# Allegro board TIDA01473B-Layer-Plots.brd
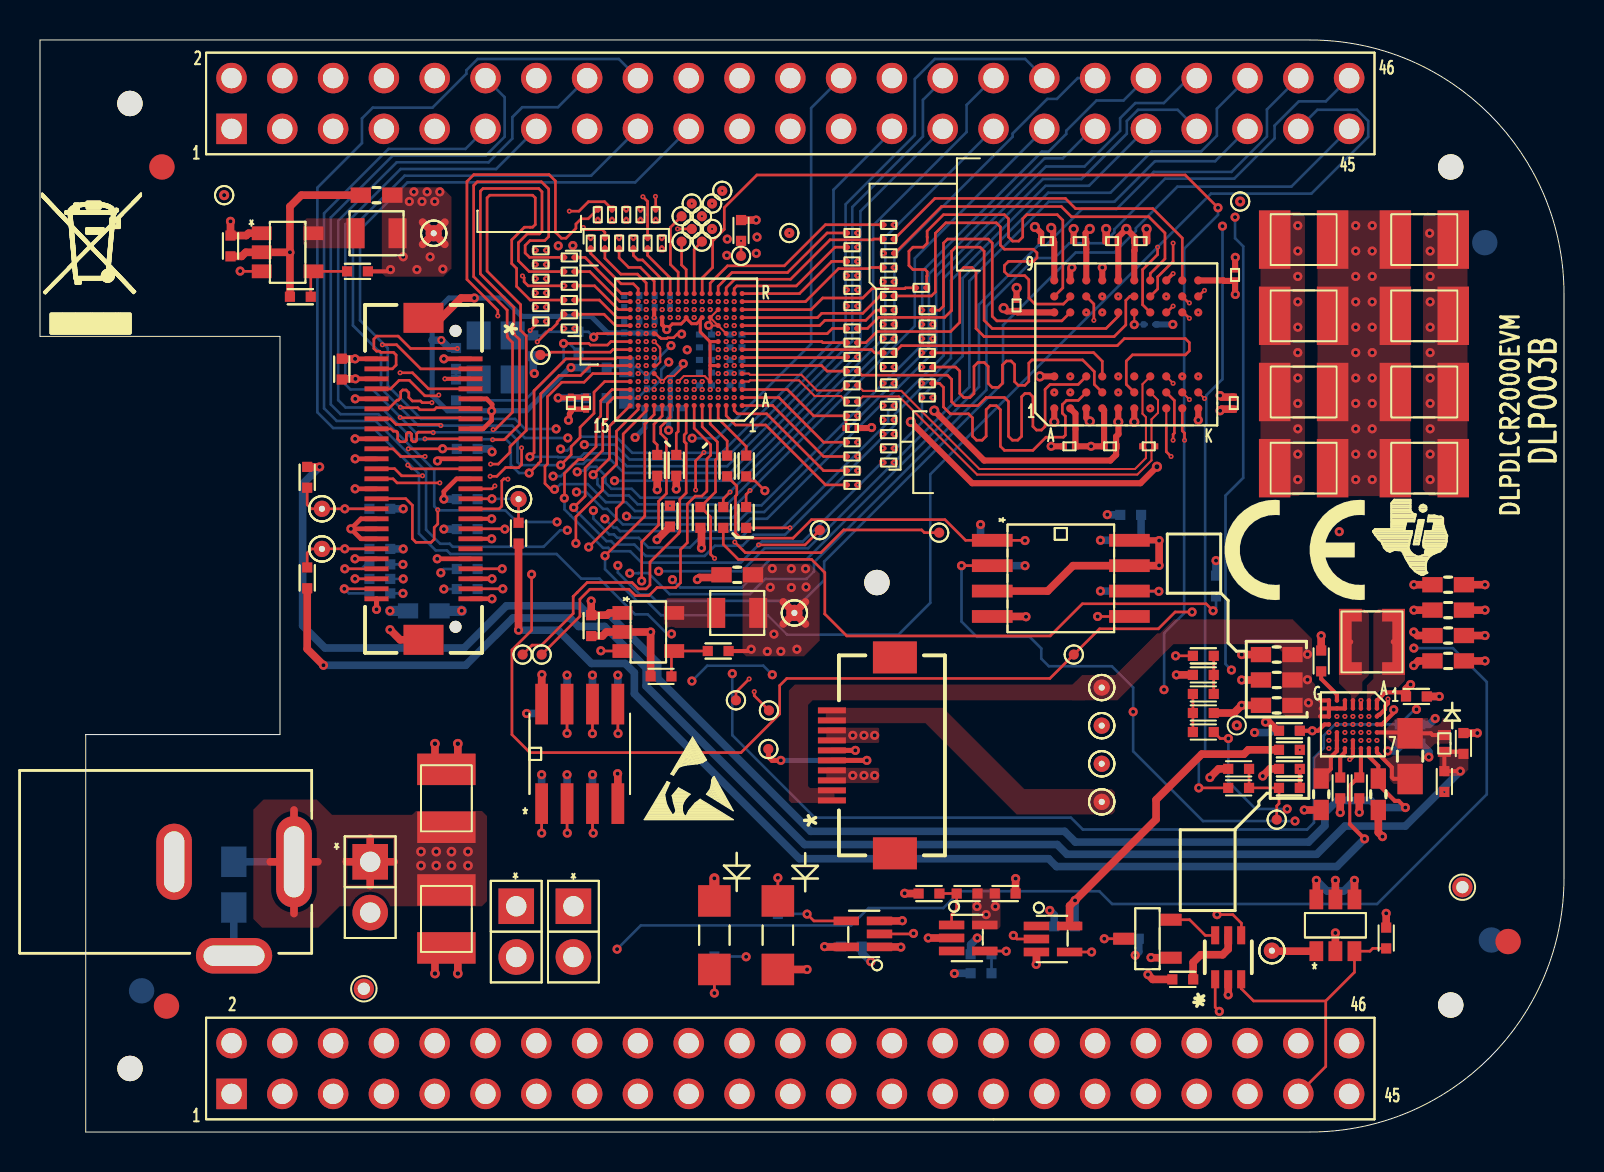
[diagram p0: board, top side]
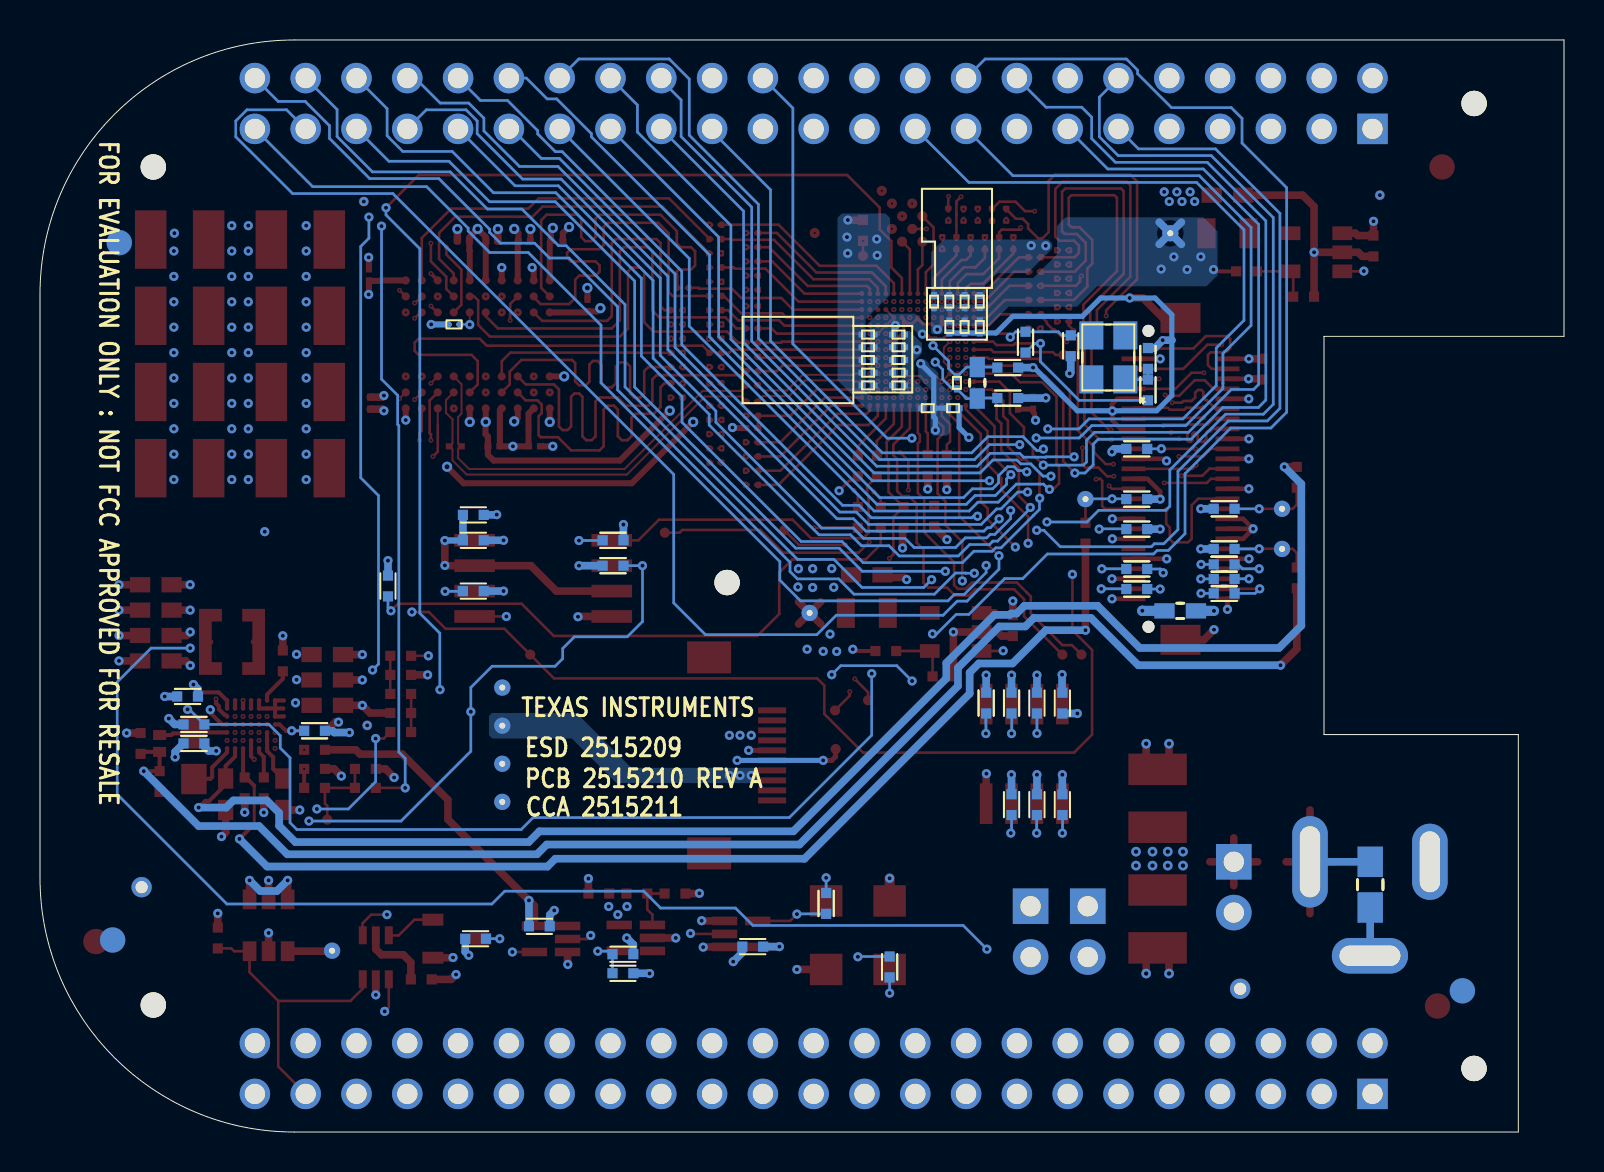
[diagram p1: board, bottom side, seen from below]

Outline 76.2 x 54.61 mm; copper layers: TOP, LY2, LY3, LY4, LY5, BOTTOM. Coordinates in mm from the lower left corner of the outline.
Outline path: 0,54.61 0,39.79 12,39.79 12,19.88 2.29,19.88 2.29,0 63.5,0 arc(72.48,3.72) 76.2,12.7 76.2,41.91 arc(72.48,50.89) 63.5,54.61 0,54.61

## Design rules (mm)
net group DMD_BUS: nets DMD_BUS DMD_BUS_T
net group DMD_D0: nets DMD_D0 DMD_D0_T
net group DMD_D1: nets DMD_D1 DMD_D1_T
net group DMD_D2: nets DMD_D2 DMD_D2_T
net group DMD_D3: nets DMD_D3 DMD_D3_T
net group DMD_D4: nets DMD_D4 DMD_D4_T
net group DMD_D5: nets DMD_D5 DMD_D5_T
net group DMD_D6: nets DMD_D6 DMD_D6_T
net group DMD_D7: nets DMD_D7 DMD_D7_T
net group DMD_D8: nets DMD_D8 DMD_D8_T
net group DMD_D9: nets DMD_D9 DMD_D9_T
net group DMD_D10: nets DMD_D10 DMD_D10_T
net group DMD_D11: nets DMD_D11 DMD_D11_T
net group DMD_D12: nets DMD_D12 DMD_D12_T
net group DMD_D13: nets DMD_D13 DMD_D13_T
net group DMD_D14: nets DMD_D14 DMD_D14_T
net group DMD_DCLK: nets DMD_DCLK DMD_DCLK_T
net group DMD_LOADB: nets DMD_LOADB DMD_LOADB_T
net group DMD_SAC_BUS: nets DMD_SAC_BUS DMD_SAC_BUS_T
net group DMD_SAC_CLK: nets DMD_SAC_CLK DMD_SAC_CLK_T
net group DMD_SCTRL: nets DMD_SCTRL DMD_SCTRL_T
net group DMD_STRB: nets DMD_STRB DMD_STRB_T
net group DMD_TRC: nets DMD_TRC DMD_TRC_T
net group MEM0_A0: nets MEM0_A0 MEM_T_A0
net group MEM0_A1: nets MEM0_A1 MEM_T_A1
net group MEM0_A2: nets MEM0_A2 MEM_T_A2
net group MEM0_A3: nets MEM0_A3 MEM_T_A3
net group MEM0_A4: nets MEM0_A4 MEM_T_A4
net group MEM0_A5: nets MEM0_A5 MEM_T_A5
net group MEM0_A6: nets MEM0_A6 MEM_T_A6
net group MEM0_A7: nets MEM0_A7 MEM_T_A7
net group MEM0_A8: nets MEM0_A8 MEM_T_A8
net group MEM0_A9: nets MEM0_A9 MEM_T_A9
net group MEM0_A10: nets MEM0_A10 MEM_T_A10
net group MEM0_A11: nets MEM0_A11 MEM_T_A11
net group MEM0_A12: nets MEM0_A12 MEM_T_A12
net group MEM0_BA0: nets MEM0_BA0 MEM_T_BA0
net group MEM0_BA1: nets MEM0_BA1 MEM_T_BA1
net group MEM0_CASZ: nets MEM0_CASZ MEM_T_CASZ
net group MEM0_CKE: nets MEM0_CKE MEM_T_CKE
net group MEM0_CLK_N: nets MEM0_CLK_N MEM_T_CLK_N
net group MEM0_CLK_P: nets MEM0_CLK_P MEM_T_CLK_P
net group MEM0_CSZ: nets MEM0_CSZ MEM_T_CSZ
net group MEM0_DQ0: nets MEM0_DQ0 MEM_T_DQ0
net group MEM0_DQ1: nets MEM0_DQ1 MEM_T_DQ1
net group MEM0_DQ2: nets MEM0_DQ2 MEM_T_DQ2
net group MEM0_DQ3: nets MEM0_DQ3 MEM_T_DQ3
net group MEM0_DQ4: nets MEM0_DQ4 MEM_T_DQ4
net group MEM0_DQ5: nets MEM0_DQ5 MEM_T_DQ5
net group MEM0_DQ6: nets MEM0_DQ6 MEM_T_DQ6
net group MEM0_DQ7: nets MEM0_DQ7 MEM_T_DQ7
net group MEM0_DQ8: nets MEM0_DQ8 MEM_T_DQ8
net group MEM0_DQ9: nets MEM0_DQ9 MEM_T_DQ9
net group MEM0_DQ10: nets MEM0_DQ10 MEM_T_DQ10
net group MEM0_DQ11: nets MEM0_DQ11 MEM_T_DQ11
net group MEM0_DQ12: nets MEM0_DQ12 MEM_T_DQ12
net group MEM0_DQ13: nets MEM0_DQ13 MEM_T_DQ13
net group MEM0_DQ14: nets MEM0_DQ14 MEM_T_DQ14
net group MEM0_DQ15: nets MEM0_DQ15 MEM_T_DQ15
net group MEM0_LDM: nets MEM0_LDM MEM_T_LDM
net group MEM0_LDQS: nets MEM0_LDQS MEM_T_LDQS
net group MEM0_RASZ: nets MEM0_RASZ MEM_T_RASZ
net group MEM0_UDM: nets MEM0_UDM MEM_T_UDM
net group MEM0_UDQS: nets MEM0_UDQS MEM_T_UDQS
net group MEM0_WEZ: nets MEM0_WEZ MEM_T_WEZ

## Placement (name value [footprint] x y rotation side)
C1  4.7uF  [0402]  9.53 44.31 90 top
C2  10uF  [0603]  16.83 46.85 180 top
C3  0.1uF  [0201]  50.36 44.55 0 top
C4  0.1uF  [0201]  51.98 44.55 0 top
C5  0.1uF  [0201]  53.61 44.55 0 top
C6  0.1uF  [0201]  55.03 44.55 180 top
C7  1uF  [0201]  59.75 42.86 270 top
C8  100uF  [1210]  63.18 44.63 180 top
C9  100uF  [1210]  69.22 44.63 0 top
C10  0.1uF  [0201]  48.83 41.34 270 top
C11  100uF  [1210]  63.18 40.82 180 top
C12  100uF  [1210]  69.22 40.82 0 top
C13  0.1uF  [0201]  26.54 36.45 90 top
C14  1uF  [0201]  27.3 36.45 90 top
C15  0.1uF  [0201]  51.47 34.29 0 top
C16  0.1uF  [0201]  53.51 34.29 180 top
C17  0.1uF  [0201]  59.69 36.45 90 top
C18  100uF  [1210]  63.18 37.01 180 top
C19  100uF  [1210]  69.22 37.01 0 top
C20  100uF  [1210]  63.18 33.2 180 top
C21  100uF  [1210]  69.22 33.2 0 top
C23  4.7uF  [0402]  27.56 25.32 90 top
C24  10uF  [0603]  34.86 27.86 180 top
C25  0.1uF  [0402_AVXA]  58.17 22.86 180 top
C26  10uF  [0603]  61.84 23.88 180 top
C27  0.1uF  [0402_AVXA]  64.06 23.56 270 top
C28  10uF  [0603]  70.41 27.37 0 top
C29  10uF  [0603]  70.41 26.1 0 top
C30  10uF  [0603]  70.41 24.83 0 top
C31  10uF  [0603]  70.41 23.56 0 top
C32  100uF  [1210]  20.32 16.69 270 top
C33  0.1uF  [0402_AVXA]  58.17 20.95 0 top
C34  10uF  [0603]  61.84 22.61 180 top
C35  10uF  [0603]  61.84 21.34 180 top
C36  1uF  [0402]  62.47 20.07 0 top
C37  0.01uF  [0402]  62.47 18.16 180 top
C38  2.2uF  [0402]  65.01 17.21 270 top
C39  1uF  [0402]  65.96 17.21 270 top
C40  1uF  [0603]  66.92 16.89 270 top
C41  0.1uF  [0402_AVXA]  68.82 21.78 0 top
C42  0.22uF  [0402]  71.17 19.43 90 top
C43  100uF  [1210]  20.32 10.66 90 top
C44  1uF  [0402]  48.26 11.93 0 top
C100  0.1uF  [0201]  34.8 39.88 180 bottom
C101  0.1uF  [0201]  34.8 39.24 180 bottom
C102  0.1uF  [0201]  33.27 39.88 0 bottom
C103  0.1uF  [0201]  33.27 39.24 0 bottom
C104  0.1uF  [0201]  31.5 41.53 270 bottom
C105  0.1uF  [0201]  30.73 41.53 270 bottom
C106  0.1uF  [0201]  30.73 40.26 90 bottom
C107  0.1uF  [0201]  29.97 41.53 270 bottom
C108  0.1uF  [0201]  29.97 40.26 90 bottom
C109  0.1uF  [0201]  29.21 41.53 270 bottom
C110  0.1uF  [0201]  29.21 40.26 90 bottom
C111  18pF  [0402]  24.66 39.32 90 bottom
C112  0.1uF  [0201]  34.8 38.61 180 bottom
C113  0.1uF  [0201]  34.8 37.97 180 bottom
C114  1uF  [0201]  34.8 37.34 180 bottom
C115  0.1uF  [0201]  33.27 38.61 0 bottom
C116  0.1uF  [0201]  33.27 37.97 0 bottom
C117  0.1uF  [0201]  33.27 37.34 0 bottom
C118  0.1uF  [0201]  31.81 36.2 180 bottom
C119  0.1uF  [0201]  30.54 36.2 0 bottom
C120  0.1uF  [0201]  30.35 37.47 270 bottom
C121  10uF  [0603]  29.34 37.47 270 bottom
C122  18pF  [0402]  20.8 38.68 90 bottom
C123  0.1uF  [0402_AVXA]  54.53 29.59 180 bottom
C124  0.1uF  [0402]  16.99 31.17 0 bottom
C125  0.1uF  [0402]  16.99 29.16 0 bottom
C126  0.1uF  [0402_AVXA]  15.09 38.15 270 top
C127  0.1uF  [0402]  21.36 31.65 180 bottom
C128  0.22uF  [0603]  19.19 26.06 180 bottom
C129  0.1uF  [0402_AVXA]  68.82 21.78 0 bottom
C130  0.1uF  [0402_AVXA]  68.5 19.43 0 bottom
C131  0.1uF  [0402_AVXA]  25.08 21.45 270 bottom
C132  0.1uF  [0402_AVXA]  51.23 10.29 180 bottom
C133  0.1uF  [0402_AVXA]  47.05 8.89 180 bottom
C134  0.1uF  [0402_AVXA]  40.56 9.27 0 bottom
D1  PMEG4002EL  [SOD882]  70.22 19.43 270 top
D2  green  [1206]  33.72 9.84 90 top
D3  green  [1206]  36.89 9.84 90 top
F100  BLM15PD800SN1D  [0402]  27.81 38.23 180 bottom
F101  BLM15PD800SN1D  [0402]  27.81 36.7 0 bottom
J1  PS-50028-05081-001  [CON_SMVT_50028-50]  19.18 32.66 270 top
J2  Pwr Jack, 2.1mm pin  [PJ-002A]  12.7 13.51 180 top
J3  HDR,2P,1R  [HDR2P_1R]  16.51 13.51 180 top
J4  HDR,2P,1R  [HDR2P_1R]  23.81 11.29 180 top
J5  HDR,2P,1R  [HDR2P_1R]  26.67 11.29 180 top
JLEDFLEX  EM,CONN,10P,ZIF  [CON_SMRT_52893-1095_NO-GND]  42.6 18.83 90 top
L1  2.2uH  [1008_2P5MMX2MM]  16.83 44.95 0 top
L2  2.2uH  [1008_2P5MMX2MM]  34.86 25.96 0 top
L3  2.2uH  [COILCRAFT_LPS3015]  66.6 24.51 180 top
L4  10uH  [0805]  68.5 18.8 90 top
NOREF  -  []  32.69 17.4 0 top
NOREF#2  -  []  96.9 37.47 0 top
NOREF#3  -  [unnamed#2]  70.54 48.26 0 top
NOREF#4  -  [unnamed#2]  4.5 51.44 0 top
NOREF#5  -  [unnamed#3]  6.32 6.3 0 top
NOREF#6  -  []  -9.45 -48.23 0 top
NOREF#7  -  []  2.29 0 90 top
NOREF#8  -  []  2.29 0 0 top
NOREF#9  -  [unnamed#2]  4.5 3.18 0 top
NOREF#10  -  []  71.96 51.38 0 top
NOREF#11  -  []  111.05 -49.99 0 top
NOREF#12  -  [unnamed#3]  73.41 9.53 0 top
NOREF#13  -  []  2.29 0 90 top
NOREF#14  -  []  -95.55 -48.74 0 top
NOREF#15  -  []  2.29 0 0 top
NOREF#16  -  [unnamed#2]  41.85 27.48 0 top
NOREF#17  -  [unnamed#2]  70.54 6.35 0 top
NOREF#18  -  []  62.74 29.11 0 top
NOREF#19  -  []  0 54.61 0 top
NOREF#20  -  []  2.29 0 90 top
NOREF#21  -  []  0 54.61 0 top
NOREF#22  -  []  68.55 30 0 top
NOREF#23  -  []  2.59 43.97 0 top
NOREF#24  -  [unnamed#3]  6.1 48.26 0 top
NOREF#25  -  []  2.29 0 90 top
NOREF#26  -  [unnamed#3]  72.57 9.6 180 bottom
NOREF#27  -  [unnamed#3]  72.24 44.48 180 bottom
NOREF#28  -  [unnamed#3]  5.08 7.06 180 bottom
P1  EM,HDR,46P,2R,2x  [PRT_12790]  9.58 50.16 90 top
P2  EM,HDR,46P,2R,2x  [PRT_12790]  9.58 1.91 90 top
R1  120k  [0402]  13.02 41.77 180 top
R2  82k  [0402]  15.88 43.04 0 top
R3  30  [0201_R]  25.04 44.09 0 top
R5  30  [0201_R]  25.04 43.38 0 top
R6  30  [0201_R]  25.04 42.67 0 top
R7  30  [0201_R]  25.04 41.96 0 top
R8  30  [0201_R]  26.47 43.74 0 top
R9  30  [0201_R]  26.47 43.03 0 top
R10  30  [0201_R]  26.47 42.32 0 top
R11  30  [0201_R]  26.47 41.61 0 top
R12  30  [0201_R]  27.53 44.45 270 top
R13  30  [0201_R]  27.89 45.87 270 top
R14  30  [0201_R]  28.24 44.45 270 top
R15  30  [0201_R]  28.6 45.87 270 top
R16  30  [0201_R]  28.96 44.45 270 top
R17  30  [0201_R]  29.31 45.87 270 top
R18  30  [0201_R]  29.67 44.45 270 top
R19  30  [0201_R]  30.02 45.87 270 top
R20  30  [0201_R]  30.38 44.45 270 top
R21  30  [0201_R]  30.78 45.87 270 top
R22  30  [0201_R]  31.09 44.45 270 top
R23  10k  [0402]  35.05 45.09 270 top
R24  30  [0201_R]  40.6 44.96 180 top
R25  30  [0201_R]  40.6 44.25 180 top
R26  30  [0201_R]  40.6 43.54 180 top
R27  30  [0201_R]  40.6 42.83 180 top
R28  30  [0201_R]  40.6 42.11 180 top
R29  30  [0201_R]  42.43 45.37 180 top
R30  30  [0201_R]  42.43 44.65 180 top
R31  30  [0201_R]  42.43 43.23 180 top
R32  30  [0201_R]  42.43 42.52 180 top
R33  30  [0201_R]  42.43 41.81 0 top
R34  30  [0201_R]  42.45 43.94 180 top
R35  30  [0201_R]  44.06 42.22 0 top
R36  30  [0201_R]  25.04 41.25 0 top
R37  30  [0201_R]  25.04 40.54 0 top
R38  30  [0201_R]  26.47 40.89 0 top
R39  30  [0201_R]  26.47 40.18 0 top
R40  30  [0201_R]  40.6 41.3 180 top
R41  30  [0201_R]  40.6 40.18 0 top
R42  30  [0201_R]  40.6 39.47 180 top
R43  30  [0201_R]  40.6 38.76 0 top
R44  30  [0201_R]  40.6 38.05 0 top
R45  30  [0201_R]  42.43 41.1 0 top
R46  30  [0201_R]  42.43 40.39 0 top
R47  30  [0201_R]  42.43 39.68 0 top
R48  30  [0201_R]  42.43 38.96 180 top
R49  30  [0201_R]  42.43 38.25 0 top
R50  30  [0201_R]  44.36 41.1 0 top
R51  30  [0201_R]  44.36 40.39 0 top
R52  30  [0201_R]  44.36 39.68 0 top
R53  30  [0201_R]  44.36 38.96 0 top
R54  30  [0201_R]  44.36 38.25 0 top
R55  30  [0201_R]  40.6 37.34 180 top
R56  30  [0201_R]  40.6 36.53 180 top
R57  30  [0201_R]  40.6 35.82 180 top
R58  10k  [0201]  40.6 35.21 0 top
R59  30  [0201_R]  40.6 34.49 180 top
R60  30  [0201_R]  42.43 37.44 0 top
R61  30  [0201_R]  42.43 36.32 0 top
R62  30  [0201_R]  42.43 35.61 180 top
R63  30  [0201_R]  42.43 34.9 180 top
R64  30  [0201_R]  42.43 34.19 180 top
R65  30  [0201_R]  44.36 37.44 0 top
R66  30  [0201_R]  44.36 36.73 0 top
R67  100  [0201]  55.44 34.29 180 top
R68  0  [0402]  13.36 32.74 270 top
R69  0  [0402]  13.36 27.71 90 top
R70  100k  [0402]  30.86 33.34 90 top
R71  10k  [0402]  31.5 30.8 270 top
R72  30.1  [0402]  31.81 33.34 270 top
R74  100k  [0402]  33.02 30.73 90 top
R75  30.1  [0402]  34.16 30.73 90 top
R76  30.1  [0402]  34.36 33.31 90 top
R77  30.1  [0402]  35.31 30.73 90 top
R78  30.1  [0402]  35.31 33.31 90 top
R79  30  [0201_R]  40.6 33.78 180 top
R80  30  [0201_R]  40.6 33.07 180 top
R81  30  [0201_R]  40.6 32.36 180 top
R82  30  [0201_R]  42.43 33.48 180 top
R83  180k  [0402]  31.05 22.78 180 top
R84  360k  [0402]  33.91 24.05 0 top
R85  1K  [0402]  58.17 23.81 0 top
R86  1K  [0402]  58.17 21.91 180 top
R87  1K  [0402]  58.17 20 0 top
R89  30.0k  [0402]  59.93 17.21 180 top
R90  0  [0402]  62.47 19.11 0 top
R91  0  [0402]  62.47 17.21 0 top
R92  0.10  [0603]  64.06 16.89 270 top
R93  100k  [0402]  70.22 17.53 270 top
R94  887k  [0402]  44.45 11.93 0 top
R95  953k  [0402]  46.36 11.93 0 top
R96  0  [0402]  57.14 7.63 180 top
R97  10k  [0402]  67.31 9.7 90 top
R100  30  [0201_R]  55.5 40.39 0 bottom
R101  953k  [0402]  26.92 39.5 270 bottom
R102  100  [0402]  20.8 37.11 90 bottom
R103  0  [0402]  54.53 30.86 0 bottom
R104  100k  [0402]  47.55 29.59 0 bottom
R105  0  [0402]  16.99 28.38 0 bottom
R106  0  [0402]  16.99 27.66 0 bottom
R107  0  [0402]  23.93 29.95 90 top
R108  100k  [0402]  21.36 30.15 180 bottom
R109  100k  [0402]  21.36 34.16 0 bottom
R110  100k  [0402]  58.8 27.3 270 bottom
R111  100k  [0402]  54.53 27.05 0 bottom
R112  100k  [0402]  47.55 28.32 180 bottom
R113  0  [0402]  16.99 26.94 0 bottom
R114  0  [0402]  21.36 28.16 0 bottom
R115  0  [0402]  21.36 27.15 0 bottom
R116  100k  [0402]  68.5 20.38 180 bottom
R117  0  [0402]  62.47 20.07 0 bottom
R118  5.6K  [0402]  28.89 21.45 90 bottom
R119  5.6K  [0402]  27.62 21.45 90 bottom
R120  0  [0402]  26.35 21.45 90 bottom
R121  4.75K  [0402]  27.62 16.37 90 bottom
R122  4.75K  [0402]  26.35 16.37 90 bottom
R123  4.75K  [0402]  25.08 16.37 90 bottom
R124  200  [0805]  9.69 12.37 270 bottom
R125  1K  [0402]  54.42 9.66 0 bottom
R126  100  [0402]  36.89 11.43 270 bottom
R128  0  [0402]  47.05 7.94 180 bottom
R129  100  [0402]  33.72 8.26 90 bottom
RT1  100k  [0402]  59.93 18.16 180 top
TP1  TP,20mil PAD  [20MIL_PAD]  9.21 46.85 0 top
TP2  TP,12mil Drill,32mil Pad  [HOLE_PLATED_12MIL_DRILL_32MIL_PAD]  19.69 44.95 0 top
TP3  TP,20mil PAD  [20MIL_PAD]  32.08 45.8 90 top
TP4  TP,20mil PAD  [20MIL_PAD]  32.08 44.53 90 top
TP5  TP,20mil PAD  [20MIL_PAD]  32.59 46.43 90 top
TP6  TP,20mil PAD  [20MIL_PAD]  32.59 45.16 90 top
TP7  TP,20mil PAD  [20MIL_PAD]  33.1 45.8 90 top
TP8  TP,20mil PAD  [20MIL_PAD]  33.1 44.53 90 top
TP9  TP,20mil PAD  [20MIL_PAD]  33.6 46.43 90 top
TP10  TP,20mil PAD  [20MIL_PAD]  33.6 45.16 90 top
TP11  TP,20mil PAD  [20MIL_PAD]  34.11 47.07 90 top
TP12  TP,20mil PAD  [20MIL_PAD]  35.05 43.81 90 top
TP13  TP,20mil PAD  [20MIL_PAD]  37.47 44.96 90 top
TP14  TP,20mil PAD  [20MIL_PAD]  60.01 46.53 0 top
TP15  TP,20mil PAD  [20MIL_PAD]  25.02 38.86 90 top
TP16  TP,12mil Drill,32mil Pad  [HOLE_PLATED_12MIL_DRILL_32MIL_PAD]  23.93 31.65 0 top
TP17  TP,12mil Drill,32mil Pad  [HOLE_PLATED_12MIL_DRILL_32MIL_PAD]  14.1 31.17 0 top
TP18  TP,12mil Drill,32mil Pad  [HOLE_PLATED_12MIL_DRILL_32MIL_PAD]  14.1 29.16 0 top
TP19  TP,20mil PAD  [20MIL_PAD]  38.99 30.1 0 top
TP20  TP,20mil PAD  [20MIL_PAD]  44.96 29.97 0 top
TP21  TP,20mil PAD  [20MIL_PAD]  24.13 23.88 0 top
TP22  TP,20mil PAD  [20MIL_PAD]  25.08 23.88 0 top
TP23  TP,12mil Drill,32mil Pad  [HOLE_PLATED_12MIL_DRILL_32MIL_PAD]  37.72 25.96 0 top
TP24  TP,20mil PAD  [20MIL_PAD]  51.69 23.88 90 top
TP25  TP,20mil PAD  [20MIL_PAD]  34.8 21.59 0 top
TP26  TP,20mil PAD  [20MIL_PAD]  36.42 19.15 180 top
TP27  TP,20mil PAD  [20MIL_PAD]  36.45 21.08 0 top
TP28  TP,12mil Drill,32mil Pad  [HOLE_PLATED_12MIL_DRILL_32MIL_PAD]  53.09 22.23 180 top
TP29  TP,12mil Drill,32mil Pad  [HOLE_PLATED_12MIL_DRILL_32MIL_PAD]  53.09 20.32 180 top
TP30  TP,12mil Drill,32mil Pad  [HOLE_PLATED_12MIL_DRILL_32MIL_PAD]  53.09 18.41 180 top
TP31  TP,12mil Drill,32mil Pad  [HOLE_PLATED_12MIL_DRILL_32MIL_PAD]  53.09 16.51 180 top
TP32  TP,20mil PAD  [20MIL_PAD]  59.84 20.34 0 top
TP33  TP,20mil PAD  [20MIL_PAD]  61.84 15.62 270 top
TP34  TP,12mil Drill,32mil Pad  [HOLE_PLATED_12MIL_DRILL_32MIL_PAD]  61.59 9.07 0 top
TPGND1  -  [TP40]  16.19 7.16 0 top
TPGND2  -  [TP40]  71.12 12.24 0 top
U1  TPS62260DDCT  [TSOT-23_DDC_R-PDSO-G5]  12.38 43.99 270 top
U2  TPS62260DDCT  [TSOT-23_DDC_R-PDSO-G5]  30.42 25.01 270 top
U3  W25Q16DW  [W25Q16DW_WINBOND]  51.04 27.69 270 top
U4  CAT24C256W  [8-SOIC]  26.99 18.91 0 top
U5  TIDLP,PAD1000  [PAD1000]  65.65 20.38 270 top
U6  SN74LVC1G125DCK  [U_5_DCK]  41.2 9.91 270 top
U7  TPS71501DCK  [U_5_DCK]  46.36 9.7 90 top
U8  LOG,INV,OPENDRN,SN74AUP1G06DCK  [U_5_DCK]  50.6 9.65 90 top
U9  -  [TLV809I50]  55.37 9.66 90 top
U10  SN74LVC1G3208  [DCK_PDSO_6]  59.41 8.74 90 top
U11  TPS22929DDBVT  [SOT23-6_DBV_R-PDSO-G6]  64.77 10.34 0 top
U12  DLPC2607  [DPP2607]  32.31 39.13 180 top
U13  MT46H32M16_FBGA_60P  [VFBGA_60]  54.31 39.39 90 top
XD100  16.66667MHz  [4_SMD]  22.78 38.73 90 bottom

## Library data of the parts
C1-C21 C23-C44 C100-C134 = PAS,CAP,NP,large
D1 = PAS,DIODE,SCHOTTKY,large
D2 D3 = PAS,DIODE,LED,large
F100 F101 = PAS,FERRITE BEAD,3
J1 = EM,CONN,50P,2R,90deg_0
J2 = EM,CONN,PWRJACK,RAPC712X_0: User Part Number: X; Tolerance: X
J3-J5 = EM,HDR,2P,1R,2x
JLEDFLEX = EM,CONN,10P,ZIF
L1-L4 = PAS,INDUCTOR, large
P1 P2 = EM,HDR,46P,2R,2x
R1 R2 R23 R58 R67-R72 R74-R78 R83-R87 R89-R97 R101-R126 R128 R129 = PAS,R,large
R3 R5-R22 R24-R57 R59-R66 R79-R82 R100 = PAS,R,large: signal model: PAS_R_LARGE_0201_R_30_30
RT1 = PAS,THERMISTOR,large
TP1-TP34 TPGND1 TPGND2 = EM,TERM,TESTPOINT
U1 U2 = PWR,REG,TPS62260,TSOT23_DDC
U3 = W25Q16DW
U4 = MEM,EEPROM,CAT24C256
U5 = TIDLP,PAD1000_0
U6 = LOG,BUF,SN74LVC1G125DCK
U7 = TPS71501DCK
U8 = LOG,INV,OPENDRN,SN74AUP1G06DCK
U9 = PWR,MON,TLV809I50
U10 = LOG,SN74LVC1G3208_2
U11 = PWR,SW,TPS22929DDBV
U12 = TIDLP,DPP2607
U13 = MEM,SDRAM,64x16,BGA_60P
XD100 = XTAL_NX3225GA

## Footprints (pads in the part's own frame, mm; a bottom-side part is the same pattern mirrored in y, then rotated)
4_SMD
  rect 1.4x1.2 smd: 1(-1.1,-0.85) 2(1.1,-0.85) 3(1.1,0.85) 4(-1.1,0.85)
8-SOIC
  rect 0.635x2.032 smd: 1(-1.905,-2.489) 2(-0.635,-2.489) 3(0.635,-2.489) 4(1.905,-2.489) 5(1.905,2.489) 6(0.635,2.489) 7(-0.635,2.489) 8(-1.905,2.489)
20MIL_PAD
  round 0.508 smd: 1(0,0)
0201
  rect 0.356x0.305 smd: 1(0.3,0) 2(-0.3,0)
0201_R
  custom 0.356x0.33 smd: 1(-0.279,0) 2(0.279,0)
0402
  rect 0.508x0.508 smd: 1(-0.521,0) 2(0.521,0)
0402_AVXA
  rect 0.508x0.508 smd: 1(-0.521,0) 2(0.521,0)
0603
  rect 1.016x0.762 smd: 1(-0.787,0) 2(0.787,0)
0805
  rect 1.524x1.27 smd: 1(-1.143,0) 2(1.143,0)
1008_2P5MMX2MM
  rect 0.9x1.5 smd: 1(-1.05,0) 2(1.05,0)
1206
  rect 1.575x1.626 smd: 1(-1.714,0) 2(1.714,0)
1210
  rect 1.575x2.921 smd: 1(1.448,0) 2(-1.448,0)
COILCRAFT_LPS3015
  custom 1.143x3.302 smd: 1(1.079,0) 2(-1.079,0)
CON_SMRT_52893-1095_NO-GND
  rect 1.6x2.2 smd: (-4.9,-0.15) (4.9,-0.15)
  rect 0.3x1.4 smd: 1(-2.25,3) 2(-1.75,3) 3(-1.25,3) 4(-0.75,3) 5(-0.25,3) 6(0.25,3) 7(0.75,3) 8(1.25,3) 9(1.75,3) 10(2.25,3)
CON_SMVT_50028-50
  round 0.6 hole 0.6 unplated: (-7.4,1.6) (7.4,1.6)
  rect 0.24x1.2 smd: 1(-6,2.35) 2(-6,-2.35) 3(-5.5,2.35) 4(-5.5,-2.35) 5(-5,2.35) 6(-5,-2.35) 7(-4.5,2.35) 8(-4.5,-2.35) 9(-4,2.35) 10(-4,-2.35) 11(-3.5,2.35) 12(-3.5,-2.35) 13(-3,2.35) 14(-3,-2.35) 15(-2.5,2.35) 16(-2.5,-2.35) 17(-2,2.35) 18(-2,-2.35) 19(-1.5,2.35) 20(-1.5,-2.35) 21(-1,2.35) 22(-1,-2.35) 23(-0.5,2.35) 24(-0.5,-2.35) 25(0,2.35) 26(0,-2.35) 27(0.5,2.35) 28(0.5,-2.35) 29(1,2.35) 30(1,-2.35) 31(1.5,2.35) 32(1.5,-2.35) 33(2,2.35) 34(2,-2.35) 35(2.5,2.35) 36(2.5,-2.35) 37(3,2.35) 38(3,-2.35) 39(3.5,2.35) 40(3.5,-2.35) 41(4,2.35) 42(4,-2.35) 43(4.5,2.35) 44(4.5,-2.35) 45(5,2.35) 46(5,-2.35) 47(5.5,2.35) 48(5.5,-2.35) 49(6,2.35) 50(6,-2.35)
  rect 1.5x2 smd: 51(-8.05,0) 52(8.05,0)
DCK_PDSO_6
  rect 0.9x0.4 smd: 1(-1.1,0.65) 2(-1.1,0) 3(-1.1,-0.65) 4(1.1,-0.65) 5(1.1,0) 6(1.1,0.65)
DPP2607
  round 0.254 smd: A1(-2.8,2.8) A2(-2.4,2.8) A3(-2,2.8) A4(-1.6,2.8) A5(-1.2,2.8) A6(-0.8,2.8) A7(-0.4,2.8) A8(0,2.8) A9(0.4,2.8) A10(0.8,2.8) A11(1.2,2.8) A12(1.6,2.8) A13(2,2.8) A14(2.4,2.8) A15(2.8,2.8) B1(-2.8,2.4) B2(-2.4,2.4) B3(-2,2.4) B4(-1.6,2.4) B5(-1.2,2.4) B6(-0.8,2.4) B7(-0.4,2.4) B8(0,2.4) B9(0.4,2.4) B10(0.8,2.4) B11(1.2,2.4) B12(1.6,2.4) B13(2,2.4) B14(2.4,2.4) B15(2.8,2.4) C1(-2.8,2) C2(-2.4,2) C3(-2,2) C4(-1.6,2) C5(-1.2,2) C6(-0.8,2) C7(-0.4,2) C8(0,2) C9(0.4,2) C10(0.8,2) C11(1.2,2) C12(1.6,2) C13(2,2) C14(2.4,2) C15(2.8,2) D1(-2.8,1.6) D2(-2.4,1.6) D3(-2,1.6) D4(-1.6,1.6) D5(-1.2,1.6) D6(-0.8,1.6) D7(-0.4,1.6) D8(0,1.6) D9(0.4,1.6) D10(0.8,1.6) D11(1.2,1.6) D12(1.6,1.6) D13(2,1.6) D14(2.4,1.6) D15(2.8,1.6) E1(-2.8,1.2) E2(-2.4,1.2) E3(-2,1.2) E4(-1.6,1.2) E12(1.6,1.2) E13(2,1.2) E14(2.4,1.2) E15(2.8,1.2) F1(-2.8,0.8) F2(-2.4,0.8) F3(-2,0.8) F4(-1.6,0.8) F12(1.6,0.8) F13(2,0.8) F14(2.4,0.8) F15(2.8,0.8) G1(-2.8,0.4) G2(-2.4,0.4) G3(-2,0.4) G4(-1.6,0.4) G12(1.6,0.4) G13(2,0.4) G14(2.4,0.4) G15(2.8,0.4) H1(-2.8,0) H2(-2.4,0) H3(-2,0) H4(-1.6,0) H12(1.6,0) H13(2,0) H14(2.4,0) H15(2.8,0) J1(-2.8,-0.4) J2(-2.4,-0.4) J3(-2,-0.4) J4(-1.6,-0.4) J12(1.6,-0.4) J13(2,-0.4) J14(2.4,-0.4) J15(2.8,-0.4) K1(-2.8,-0.8) K2(-2.4,-0.8) K3(-2,-0.8) K4(-1.6,-0.8) K12(1.6,-0.8) K13(2,-0.8) K14(2.4,-0.8) K15(2.8,-0.8) L1(-2.8,-1.2) L2(-2.4,-1.2) L3(-2,-1.2) L4(-1.6,-1.2) L12(1.6,-1.2) L13(2,-1.2) L14(2.4,-1.2) L15(2.8,-1.2) M1(-2.8,-1.6) M2(-2.4,-1.6) M3(-2,-1.6) M4(-1.6,-1.6) M5(-1.2,-1.6) M6(-0.8,-1.6) M7(-0.4,-1.6) M8(0,-1.6) M9(0.4,-1.6) M10(0.8,-1.6) M11(1.2,-1.6) M12(1.6,-1.6) M13(2,-1.6) M14(2.4,-1.6) M15(2.8,-1.6) N1(-2.8,-2) N2(-2.4,-2) N3(-2,-2) N4(-1.6,-2) N5(-1.2,-2) N6(-0.8,-2) N7(-0.4,-2) N8(0,-2) N9(0.4,-2) N10(0.8,-2) N11(1.2,-2) N12(1.6,-2) N13(2,-2) N14(2.4,-2) N15(2.8,-2) P1(-2.8,-2.4) P2(-2.4,-2.4) P3(-2,-2.4) P4(-1.6,-2.4) P5(-1.2,-2.4) P6(-0.8,-2.4) P7(-0.4,-2.4) P8(0,-2.4) P9(0.4,-2.4) P10(0.8,-2.4) P11(1.2,-2.4) P12(1.6,-2.4) P13(2,-2.4) P14(2.4,-2.4) P15(2.8,-2.4) R1(-2.8,-2.8) R2(-2.4,-2.8) R3(-2,-2.8) R4(-1.6,-2.8) R5(-1.2,-2.8) R6(-0.8,-2.8) R7(-0.4,-2.8) R8(0,-2.8) R9(0.4,-2.8) R10(0.8,-2.8) R11(1.2,-2.8) R12(1.6,-2.8) R13(2,-2.8) R14(2.4,-2.8) R15(2.8,-2.8)
HDR2P_1R
  rect 1.778x1.778 hole 1.016: 1(0,0)
  round 1.778 hole 1.016: 2(0,2.54)
HOLE_PLATED_12MIL_DRILL_32MIL_PAD
  round 0.813 hole 0.305: 1(0,0)
PAD1000
  round 0.229 smd: A1(-1.2,1.2) A2(-0.8,1.2) A3(-0.4,1.2) A4(0,1.2) A5(0.4,1.2) A6(0.8,1.2) A7(1.2,1.2) B1(-1.2,0.8) B2(-0.8,0.8) B3(-0.4,0.8) B4(0,0.8) B5(0.4,0.8) B6(0.8,0.8) B7(1.2,0.8) C1(-1.2,0.4) C2(-0.8,0.4) C3(-0.4,0.4) C4(0,0.4) C5(0.4,0.4) C6(0.8,0.4) C7(1.2,0.4) D1(-1.2,0) D2(-0.8,0) D3(-0.4,0) D4(0,0) D5(0.4,0) D6(0.8,0) D7(1.2,0) E1(-1.2,-0.4) E2(-0.8,-0.4) E3(-0.4,-0.4) E4(0,-0.4) E5(0.4,-0.4) E6(0.8,-0.4) E7(1.2,-0.4) F1(-1.2,-0.8) F2(-0.8,-0.8) F3(-0.4,-0.8) F4(0,-0.8) F5(0.4,-0.8) F6(0.8,-0.8) F7(1.2,-0.8) G1(-1.2,-1.2) G2(-0.8,-1.2) G3(-0.4,-1.2) G4(0,-1.2) G5(0.4,-1.2) G6(0.8,-1.2) G7(1.2,-1.2)
PJ-002A
  oval 1.778x4.572 hole 1.016x3.556: 1(0,0)
  oval 1.778x3.81 hole 1.016x3.048: 2(5.994,0)
  oval 3.81x1.778 hole 3.048x1.016: 3(2.997,4.699)
PRT_12790
  rect 1.524x1.524 hole 1.016: 1(0,0)
  round 1.524 hole 1.016: 2(2.54,0) 3(0,-2.54) 4(2.54,-2.54) 5(0,-5.08) 6(2.54,-5.08) 7(0,-7.62) 8(2.54,-7.62) 9(0,-10.16) 10(2.54,-10.16) 11(0,-12.7) 12(2.54,-12.7) 13(0,-15.24) 14(2.54,-15.24) 15(0,-17.78) 16(2.54,-17.78) 17(0,-20.32) 18(2.54,-20.32) 19(0,-22.86) 20(2.54,-22.86) 21(0,-25.4) 22(2.54,-25.4) 23(0,-27.94) 24(2.54,-27.94) 25(0,-30.48) 26(2.54,-30.48) 27(0,-33.02) 28(2.54,-33.02) 29(0,-35.56) 30(2.54,-35.56) 31(0,-38.1) 32(2.54,-38.1) 33(0,-40.64) 34(2.54,-40.64) 35(0,-43.18) 36(2.54,-43.18) 37(0,-45.72) 38(2.54,-45.72) 39(0,-48.26) 40(2.54,-48.26) 41(0,-50.8) 42(2.54,-50.8) 43(0,-53.34) 44(2.54,-53.34) 45(0,-55.88) 46(2.54,-55.88)
SOD882
  rect 0.5x0.65 smd: 1(-0.421,0) 2(0.421,0)
SOT23-6_DBV_R-PDSO-G6
  rect 0.686x0.991 smd: 1(-0.953,-1.295) 2(0,-1.295) 3(0.953,-1.295) 4(0.953,1.295) 5(0,1.295) 6(-0.953,1.295)
TLV809I50
  rect 0.6x1.05 smd: 1(-0.95,-1.185) 2(0.95,-1.185) 3(0,1.185)
TP40
  round 1.016 hole 0.61: 1(0,0)
TSOT-23_DDC_R-PDSO-G5
  rect 0.686x0.991 smd: 1(-0.953,-1.295) 2(0,-1.295) 3(0.953,-1.295) 4(0.953,1.295) 5(-0.953,1.295)
U_5_DCK
  rect 0.432x1.27 smd: 1(0.65,0.775) 2(0,0.775) 3(-0.65,0.775) 4(-0.65,-0.884) 5(0.65,-0.884)
unnamed#2
  round 1.27 hole 3.175 unplated: (0,0)
unnamed#3
  round 1.27 smd: (0,0)
VFBGA_60
  round 0.406 smd: A1(-3.2,3.6) A2(-2.4,3.6) A3(-1.6,3.6) A7(1.6,3.6) A8(2.4,3.6) A9(3.2,3.6) B1(-3.2,2.8) B2(-2.4,2.8) B3(-1.6,2.8) B7(1.6,2.8) B8(2.4,2.8) B9(3.2,2.8) C1(-3.2,2) C2(-2.4,2) C3(-1.6,2) C7(1.6,2) C8(2.4,2) C9(3.2,2) D1(-3.2,1.2) D2(-2.4,1.2) D3(-1.6,1.2) D7(1.6,1.2) D8(2.4,1.2) D9(3.2,1.2) E1(-3.2,0.4) E2(-2.4,0.4) E3(-1.6,0.4) E7(1.6,0.4) E8(2.4,0.4) E9(3.2,0.4) F1(-3.2,-0.4) F2(-2.4,-0.4) F3(-1.6,-0.4) F7(1.6,-0.4) F8(2.4,-0.4) F9(3.2,-0.4) G1(-3.2,-1.2) G2(-2.4,-1.2) G3(-1.6,-1.2) G7(1.6,-1.2) G8(2.4,-1.2) G9(3.2,-1.2) H1(-3.2,-2) H2(-2.4,-2) H3(-1.6,-2) H7(1.6,-2) H8(2.4,-2) H9(3.2,-2) J1(-3.2,-2.8) J2(-2.4,-2.8) J3(-1.6,-2.8) J7(1.6,-2.8) J8(2.4,-2.8) J9(3.2,-2.8) K1(-3.2,-3.6) K2(-2.4,-3.6) K3(-1.6,-3.6) K7(1.6,-3.6) K8(2.4,-3.6) K9(3.2,-3.6)
W25Q16DW_WINBOND
  rect 0.635x2.032 smd: 1(-1.905,-3.429) 2(-0.635,-3.429) 3(0.635,-3.429) 4(1.905,-3.429) 5(1.905,3.429) 6(0.635,3.429) 7(-0.635,3.429) 8(-1.905,3.429)

## Nets
DGND: C1.1(P) C2.2(N) C3.2(N) C4.2(N) C5.2(N) C6.2(N) C7.2(N) C8.1(P) C9.1(P) C10.2(N) C11.1(P) C12.1(P) C13.2(N) C14.2(N) C15.2(N) C16.2(N) C17.2(N) C18.1(P) C19.1(P) C20.1(P) C21.1(P) C23.1(P) C24.2(N) C25.2(N) C26.2(N) C27.1(P) C28.2(N) C29.2(N) C30.2(N) C31.2(N) C32.2(N) C33.2(N) C34.2(N) C35.2(N) C36.1(P) C37.2(N) C38.2(N) C39.2(N) C40.2(N) C41.2(N) C42.2(N) C43.2(N) C44.2(N) C100.2(N) C101.2(N) C102.2(N) C103.2(N) C104.2(N) C105.2(N) C106.2(N) C107.2(N) C108.2(N) C109.2(N) C110.2(N) C111.1(P) C112.2(N) C113.2(N) C114.2(N) C115.2(N) C116.2(N) C117.2(N) C118.2(N) C119.2(N) C122.2(N) C123.2(N) C124.2(N) C125.2(N) C126.2(N) C127.2(N) C128.2(N) C129.2(N) C130.2(N) C131.2(N) C132.2(N) C133.2(N) C134.2(N) D3.1(P1) F100.2(N2) J1.5(P5) J1.6(P6) J1.9(P9) J1.10(P10) J1.15(P15) J1.18(P18) J1.25(P25) J1.28(P28) J1.33(P33) J1.34(P34) J1.36(P36) J1.37(P37) J1.38(P38) J1.45(P45) J1.49(P49) J1.50(P50) J1.51(P51) J1.52(P52) J2.2(SLEEVE) J3.2 J4.1 J5.1 JLEDFLEX.6(P6) P1.1(P1) P1.2(P2) P2.1(P1) P2.2(P2) P2.44(P44) P2.45(P45) P2.46(P46) R1.2(N2) R23.1(N1) R58.1(N1) R72.2(N2) R74.1(N1) R83.2(N2) R92.2(N2) R94.1(N1) R100.2(N2) R111.1(N1) R112.1(N1) RT1.2 TP1.1(P1) TP14.1(P1) TPGND1.1(P1) TPGND2.1(P1) U1.2(GND) U2.2(GND) U3.4(GND) U4.4(GND) U5.A3(AGND1) U5.A6(PGNDR) U5.C1(PGNDL_1) U5.C2(PGNDL_2) U5.D6(DGND) U5.D7(AGND) U6.1(OEZ) U6.3(GND) U7.2(GND) U8.3(GND) U9.1(GND) U10.2(GND) U11.2(GND#2) U11.5(GND#5) U12.D4(VSS#D4) U12.D7(VSS#D7) U12.D10(VSS#D10) U12.D12(VSS#D12) U12.G4(VSS#G4) U12.G12(VSS#G12) U12.H4(VSS#H4) U12.K4(VSS#K4) U12.L12(VSS#L12) U12.M4(VSS#M4) U12.M7(VSS#M7) U12.M10(VSS#M10) U13.A1(VSS#A1) U13.A3(VSSQ#A3) U13.B9(VSSQ#B9) U13.C1(VSSQ#C1) U13.D9(TEST) U13.E1(VSSQ#E1) U13.F1(VSS#F1) U13.K1(VSS#K1)
V2V5: C38.1(P) U5.E7(V2V5)
V6V: C27.2(N) U5.F1(V6V)
VDD_PLL: C120.1(P) C121.2(N) F101.2(N2) U12.H12(VDD_PLL)
VINA: C36.2(N) R117.2(N2) U5.G4(VINA)
VINTF: C118.1(P) C119.1(P) C131.1(P) P2.3(P3) R118.2(N2) R119.2(N2) R120.2(N2) R121.2(N2) R122.2(N2) R123.2(N2) TP34.1(P1) U4.8(VCC) U11.1(VOUT) U12.D11(VCC_INTF#D11) U12.E12(VCC_INTF#E12)
VSS_PLL: C120.2(N) C121.1(P) F100.1(N1) U12.J13(VSS_PLL)
B[0]: P1.19(P19) U12.G14(PDATA_0)
B[1]: P1.17(P17) U12.G13(PDATA_1)
B[2]: P1.16(P16) U12.F15(PDATA_2)
B[3]: P1.34(P34) U12.F14(PDATA_3)
B[4]: P1.35(P35) U12.F13(PDATA_4)
B[5]: P1.33(P33) U12.E15(PDATA_5)
B[6]: P1.31(P31) U12.E14(PDATA_6)
B[7]: P1.32(P32) U12.E13(PDATA_7)
BLU_CATHODE: JLEDFLEX.9(P9) JLEDFLEX.10(P10) TP31.1(P1) U5.G7(SW6)
CMP_OUT: R74.2(N2) U5.D4(CMP_OUT) U12.A6(CMP_OUT)
CMP_PWM_F: C25.1(P) R85.2(N2) R86.1(N1)
CMP_PWM_F2: C33.1(P) R86.2(N2) R87.1(N1)
CMP_PWR: R89.2(N2) U12.P5(GPIO0_CMPPWR)
DATEN: P1.30(P30) U12.G15(DATEN_CMD)
DBIC_CSZ: R71.1(N1) U12.B10(DBIC_CSZ)
DMD_BUS: J1.27(P27) R37.1(N1)
DMD_BUS_T: R37.2(N2) U12.L13(DMD_DAD_BUS)
DMD_D0: J1.26(P26) R11.1(N1)
DMD_D0_T: R11.2(N2) U12.M15(DMD_D0)
DMD_D1: J1.4(P4) R6.1(N1)
DMD_D1_T: R6.2(N2) U12.N14(DMD_D1)
DMD_D2: J1.8(P8) R7.1(N1)
DMD_D2_T: R7.2(N2) U12.M14(DMD_D2)
DMD_D3: J1.12(P12) R10.1(N1)
DMD_D3_T: R10.2(N2) U12.N15(DMD_D3)
DMD_D4: J1.14(P14) R13.1(N1)
DMD_D4_T: R13.2(N2) U12.P13(DMD_D4)
DMD_D5: J1.16(P16) R5.1(N1)
DMD_D5_T: R5.2(N2) U12.P14(DMD_D5)
DMD_D6: J1.24(P24) R9.1(N1)
DMD_D6_T: R9.2(N2) U12.P15(DMD_D6)
DMD_D7: J1.20(P20) R8.1(N1)
DMD_D7_T: R8.2(N2) U12.R15(DMD_D7)
DMD_D8: J1.7(P7) R16.1(N1)
DMD_D8_T: R16.2(N2) U12.R12(DMD_D8)
DMD_D9: J1.3(P3) R19.1(N1)
DMD_D9_T: R19.2(N2) U12.N11(DMD_D9)
DMD_D10: J1.13(P13) R17.1(N1)
DMD_D10_T: R17.2(N2) U12.P11(DMD_D10)
DMD_D11: J1.11(P11) R18.1(N1)
DMD_D11_T: R18.2(N2) U12.R11(DMD_D11)
DMD_D12: R22.1(N1) R105.2(N2)
DMD_D12_OPT: J1.44(P44) R105.1(N1)
DMD_D12_T: R22.2(N2) U12.N10(DMD_D12)
DMD_D13: R21.1(N1) R106.2(N2)
DMD_D13_OPT: J1.46(P46) R106.1(N1)
DMD_D13_T: R21.2(N2) U12.P10(DMD_D13)
DMD_D14: R20.1(N1) R113.2(N2)
DMD_D14_OPT: J1.48(P48) R113.1(N1)
DMD_D14_T: R20.2(N2) U12.R10(DMD_D14)
DMD_DCLK: J1.17(P17) R3.1(N1)
DMD_DCLK_T: R3.2(N2) U12.N13(DMD_DCLK)
DMD_LOADB: J1.19(P19) R14.1(N1) R109.1(N1)
DMD_LOADB_T: R14.2(N2) U12.R13(DMD_LOADB)
DMD_OEZ: J1.35(P35) R108.1(N1) U12.M13(DMD_DAD_OEZ)
DMD_SAC_BUS: J1.31(P31) R38.1(N1)
DMD_SAC_BUS_T: R38.2(N2) U12.L15(DMD_SAC_BUS)
DMD_SAC_CLK: R36.1(N1) R114.1(N1)
DMD_SAC_CLK_OPT: J1.43(P43) R114.2(N2)
DMD_SAC_CLK_T: R36.2(N2) U12.L14(DMD_SAC_CLK)
DMD_SCTRL: J1.23(P23) R12.1(N1)
DMD_SCTRL_T: R12.2(N2) U12.R14(DMD_SCTRL)
DMD_STRB: J1.30(P30) R39.1(N1)
DMD_STRB_T: R39.2(N2) U12.K13(DMD_DAD_STRB)
DMD_TRC: R15.1(N1) R115.1(N1)
DMD_TRC_OPT: J1.47(P47) R115.2(N2)
DMD_TRC_T: R15.2(N2) U12.P12(DMD_TRC)
DMD_VBIAS: C124.1(P) J1.32(P32) R68.2(N2) TP17.1(P1)
DMD_VOFS: C127.1(P) J1.29(P29) R107.2(N2) TP16.1(P1)
DMD_VRST: C125.1(P) J1.40(P40) R69.2(N2) TP18.1(P1)
DPP_CMP_PWM: R85.1(N1) U12.B7(CMP_PWM)
DPP_PLLI: C111.2(N) R101.1(N1) U12.K15(PLL_REFCLK_I) XD100.3(N)
DPP_PLLO: R101.2(N2) R102.1(N1) U12.J15(PLL_REFCLK_O)
DPP_SPICLK: R78.2(N2) U12.A4(SPICLK)
DPP_SPICSZ0: R76.2(N2) U12.A5(SPICSZ0)
DPP_SPICSZ1: R75.2(N2) U12.C6(SPICSZ1)
DPP_SPIDOUT: R77.2(N2) U12.C5(SPIDOUT)
FLEX_TP: JLEDFLEX.5(P5) TP26.1(P1)
FLSH_1P8V: C123.1(P) R103.2(N2) U3.3(/WP) U3.7(/HOLD) U3.8(VCC)
G[0]: P1.13(P13) U12.D15(PDATA_8)
G[1]: P1.12(P12) U12.D14(PDATA_9)
G[2]: P1.42(P42) U12.C15(PDATA_10)
G[3]: P1.39(P39) U12.C14(PDATA_11)
G[4]: P1.40(P40) U12.C13(PDATA_12)
G[5]: P1.37(P37) U12.B15(PDATA_13)
G[6]: P1.38(P38) U12.B14(PDATA_14)
G[7]: P1.36(P36) U12.A15(PDATA_15)
GPIO1_RPWM: TP7.1(P1) U12.N8(GPIO1_RPWM)
GPIO2_GPWM: TP5.1(P1) U12.P9(GPIO2_GPWM)
GPIO3_BPWM: TP4.1(P1) U12.R8(GPIO3_BPWM)
GPIO4: P1.26(P26) U8.2(A) U12.C9(GPIO4_INTF)
GPIO5: P1.18(P18) U12.B9(GPIO5_INTF)
GRN_CATHODE: JLEDFLEX.7(P7) JLEDFLEX.8(P8) TP30.1(P1) U5.G6(SW5)
HOST_PRESENTZ: P2.43(P43) R97.1(N1) U10.3(B) U11.3(ON)
HSYNC: P1.29(P29) U12.H13(HSYNC_CS)
HWTEST_EN: R72.1(N1) U12.A9(HWTEST_EN)
JTAG_TCK: TP13.1(P1) U12.N5(JTAGTCK)
JTAG_TDI: TP11.1(P1) U12.P6(JTAGTDI)
JTAG_TDO: TP8.1(P1) U12.R7(JTAGTDO)
JTAG_TMS: TP10.1(P1) U12.N7(JTAGTMS)
JTAGTRSTZ: R23.2(N2) TP12.1(P1) U12.P8(JTAGTRSTZ)
L1: L3.2 U5.B1(L1_1) U5.B2(L1_2)
L2: L3.1 U5.D1(L2_1) U5.D2(L2_2)
LED_ANODE: C26.1(P) C34.1(P) C35.1(P) JLEDFLEX.1(P1) JLEDFLEX.2(P2) TP28.1(P1) U5.E1(VLED_1) U5.E2(VLED_2) U5.F2(VLED_3) U5.G1(SW1) U5.G2(SW2) U5.G3(SW3)
LED_ENABLE: R70.2(N2) U12.A11(LED_ENABLE)
LED_SEL_0: U5.F3(LED_SEL0) U12.R6(LED_SEL_0)
LED_SEL_1: U5.E3(LED_SEL1) U12.N6(LED_SEL_1)
LEDDRV_ON: TP9.1(P1) U12.P7(LEDDRV_ON)
MEM0_A0: R31.1(N1) U13.J8(A0)
MEM0_A1: R30.1(N1) U13.J9(A1)
MEM0_A2: R26.1(N1) U13.K7(A2)
MEM0_A3: R25.1(N1) U13.K8(A3)
MEM0_A4: R79.1(N1) U13.K2(A4)
MEM0_A5: R59.1(N1) U13.K3(A5)
MEM0_A6: R80.1(N1) U13.J1(A6)
MEM0_A7: R64.1(N1) U13.J2(A7)
MEM0_A8: R62.1(N1) U13.J3(A8)
MEM0_A9: R81.1(N1) U13.H1(A9)
MEM0_A10: R32.1(N1) U13.J7(A10)
MEM0_A11: R82.1(N1) U13.H2(A11)
MEM0_A12: R63.1(N1) U13.H3(A12)
MEM0_A13: R100.1(N1) U13.F7(A13)
MEM0_BA0: R40.1(N1) U13.H8(BA0)
MEM0_BA1: R27.1(N1) U13.H9(BA1)
MEM0_CASZ: R24.1(N1) U13.G8(C\A\S\)
MEM0_CKE: R57.1(N1) U13.G1(CKE)
MEM0_CLK_N: R55.1(N1) R67.1(N1) U13.G3(C\K\)
MEM0_CLK_P: R56.1(N1) R67.2(N2) U13.G2(CK)
MEM0_CSZ: R28.1(N1) U13.H7(C\S\)
MEM0_DQ0: R35.1(N1) U12.N1(MEM0_DQ0)
MEM0_DQ1: R50.1(N1) U12.M2(MEM0_DQ1)
MEM0_DQ2: R33.1(N1) U12.M1(MEM0_DQ2)
MEM0_DQ3: R46.1(N1) U12.L3(MEM0_DQ3)
MEM0_DQ4: R51.1(N1) U12.L2(MEM0_DQ4)
MEM0_DQ5: R47.1(N1) U12.K2(MEM0_DQ5)
MEM0_DQ6: R45.1(N1) U12.L1(MEM0_DQ6)
MEM0_DQ7: R41.1(N1) U12.K1(MEM0_DQ7)
MEM0_DQ8: R49.1(N1) U12.H2(MEM0_DQ8)
MEM0_DQ9: R54.1(N1) U12.G2(MEM0_DQ9)
MEM0_DQ10: R53.1(N1) U12.H3(MEM0_DQ10)
MEM0_DQ11: R65.1(N1) U12.F3(MEM0_DQ11)
MEM0_DQ12: R44.1(N1) U12.F1(MEM0_DQ12)
MEM0_DQ13: R66.1(N1) U12.E2(MEM0_DQ13)
MEM0_DQ14: R60.1(N1) U12.F2(MEM0_DQ14)
MEM0_DQ15: R61.1(N1) U12.E3(MEM0_DQ15)
MEM0_LDM: R42.1(N1) U13.F8(LDM)
MEM0_LDQS: R52.1(N1) U12.J2(MEM0_LDQS)
MEM0_RASZ: R34.1(N1) U13.G9(R\A\S\)
MEM0_UDM: R48.1(N1) U13.F2(UDM)
MEM0_UDQS: R43.1(N1) U12.G1(MEM0_UDQS)
MEM0_WEZ: R29.1(N1) U13.G7(W\E\)
MEM_T_A0: R31.2(N2) U12.P1(MEM0_A0)
MEM_T_A1: R30.2(N2) U12.R3(MEM0_A1)
MEM_T_A2: R26.2(N2) U12.R1(MEM0_A2)
MEM_T_A3: R25.2(N2) U12.R2(MEM0_A3)
MEM_T_A4: R79.2(N2) U12.A1(MEM0_A4)
MEM_T_A5: R59.2(N2) U12.B1(MEM0_A5)
MEM_T_A6: R80.2(N2) U12.A2(MEM0_A6)
MEM_T_A7: R64.2(N2) U12.B2(MEM0_A7)
MEM_T_A8: R62.2(N2) U12.D2(MEM0_A8)
MEM_T_A9: R81.2(N2) U12.A3(MEM0_A9)
MEM_T_A10: R32.2(N2) U12.P2(MEM0_A10)
MEM_T_A11: R82.2(N2) U12.B3(MEM0_A11)
MEM_T_A12: R63.2(N2) U12.D3(MEM0_A12)
MEM_T_BA0: R40.2(N2) U12.M3(MEM0_BA0)
MEM_T_BA1: R27.2(N2) U12.P3(MEM0_BA1)
MEM_T_CASZ: R24.2(N2) U12.R4(MEM0_CASZ)
MEM_T_CKE: R57.2(N2) R58.2(N2) U12.C1(MEM0_CKE)
MEM_T_CLK_N: R55.2(N2) U12.E1(MEM0_CLK_N)
MEM_T_CLK_P: R56.2(N2) U12.D1(MEM0_CLK_P)
MEM_T_CSZ: R28.2(N2) U12.J3(MEM0_CSZ)
MEM_T_DQ0: R35.2(N2) U13.A8(DQ0)
MEM_T_DQ1: R50.2(N2) U13.B7(DQ1)
MEM_T_DQ2: R33.2(N2) U13.B8(DQ2)
MEM_T_DQ3: R46.2(N2) U13.C7(DQ3)
MEM_T_DQ4: R51.2(N2) U13.C8(DQ4)
MEM_T_DQ5: R47.2(N2) U13.D7(DQ5)
MEM_T_DQ6: R45.2(N2) U13.D8(DQ6)
MEM_T_DQ7: R41.2(N2) U13.E7(DQ7)
MEM_T_DQ8: R49.2(N2) U13.E3(DQ8)
MEM_T_DQ9: R54.2(N2) U13.D2(DQ9)
MEM_T_DQ10: R53.2(N2) U13.D3(DQ10)
MEM_T_DQ11: R65.2(N2) U13.C2(DQ11)
MEM_T_DQ12: R44.2(N2) U13.C3(DQ12)
MEM_T_DQ13: R66.2(N2) U13.B2(DQ13)
MEM_T_DQ14: R60.2(N2) U13.B3(DQ14)
MEM_T_DQ15: R61.2(N2) U13.A2(DQ15)
MEM_T_LDM: R42.2(N2) U12.J1(MEM0_LDM)
MEM_T_LDQS: R52.2(N2) U13.E8(LDQS)
MEM_T_RASZ: R34.2(N2) U12.P4(MEM0_RASZ)
MEM_T_UDM: R48.2(N2) U12.H1(MEM0_UDM)
MEM_T_UDQS: R43.2(N2) U13.E2(UDQS)
MEM_T_WEZ: R29.2(N2) U12.R5(MEM0_WEZ)
P1P0V: C2.1(P) C13.1(P) C14.1(P) C104.1(P) C105.1(P) C106.1(P) C107.1(P) C108.1(P) C109.1(P) C110.1(P) F101.1(N1) L1.2 R2.2(N2) TP2.1(P1) U12.D5(VDD#D5) U12.D9(VDD#D9) U12.F4(VDD#F4) U12.F12(VDD#F12) U12.J4(VDD#J4) U12.J12(VDD#J12) U12.M6(VDD#M6) U12.M8(VDD#M8) U12.M11(VDD#M11)
P1P0V_FB: R1.1(N1) R2.1(N1) U1.4(FB)
P1P0V_SW: L1.1 U1.5(SW)
P1P8V: C3.1(P) C4.1(P) C5.1(P) C6.1(P) C7.1(P) C10.1(P) C15.1(P) C16.1(P) C17.1(P) C24.1(P) C100.1(P) C101.1(P) C102.1(P) C103.1(P) C112.1(P) C113.1(P) C114.1(P) C115.1(P) C116.1(P) C117.1(P) C126.1(P) C128.1(P) C130.1(P) J1.1(P1) J1.2(P2) J1.21(P21) J1.22(P22) J1.41(P41) J1.42(P42) L2.2 R70.1(N1) R71.2(N2) R84.2(N2) R103.1(N1) R104.1(N1) R108.2(N2) R109.2(N2) R110.1(N1) R116.1(N1) TP23.1(P1) U5.B5(VSPI) U11.4(VIN#4) U11.6(VIN#6) U12.C4(VCC_18#C4) U12.D6(VCC_FLSH) U12.D8(VCC_18#D8) U12.E4(VCC_18#E4) U12.G3(VCC_18#G3) U12.K3(VCC_18#K3) U12.K12(VCC_18#K12) U12.L4(VCC_18#L4) U12.M5(VCC_18#M5) U12.M9(VCC_18#M9) U12.M12(VCC_18#M12) U12.N4(VCC_18#N4) U12.N12(VCC_18#N12) U13.A7(VDDQ#A7) U13.A9(VDD#A9) U13.B1(VDDQ#B1) U13.C9(VDDQ#C9) U13.D1(VDDQ#D1) U13.E9(VDDQ#E9) U13.F9(VDD#F9) U13.K9(VDD#K9)
P1P8V_FB: R83.1(N1) R84.1(N1) U2.4(FB)
P1P8V_SW: L2.1 U2.5(SW)
P2P5V: C44.1(P) C132.1(P) C134.1(P) D2.2(P2) R90.1(N1) R95.2(N2) U6.5(VCC) U7.5(OUT) U8.5(PWR)
PARKZ: R116.2(N2) U5.B4(INTZ) U12.B8(PARKZ)
PCLK: P1.28(P28) U12.D13(PCLK)
PDM_CVS_TE: TP15.1(P1) U12.H15(PDM_CVS_TE)
PROJ_ON: U5.E6(PROJ_ON) U6.2(A) U10.4(Y)
PROJ_ON_EXT: P2.15(P15) U10.1(A)
PROJ_ON_S/A: U9.2(R\E\S\E\T\) U10.6(C)
PWM_IN: R87.2(N2) U5.D5(PWM_IN)
PWR_EN: U1.3(EN) U2.3(EN) U5.D3(PWR_EN)
PWR_SUPERVISOR: R125.1(N1) U9.3(VDD)
R[0]: P1.14(P14) U12.A14(PDATA_16)
R[1]: P1.11(P11) U12.B13(PDATA_17)
R[2]: P1.15(P15) U12.A13(PDATA_18)
R[3]: P1.45(P45) U12.C12(PDATA_19)
R[4]: P1.46(P46) U12.B12(PDATA_20)
R[5]: P1.43(P43) U12.A12(PDATA_21)
R[6]: P1.44(P44) U12.C11(PDATA_22)
R[7]: P1.41(P41) U12.B11(PDATA_23)
RED_CATHODE: JLEDFLEX.3(P3) JLEDFLEX.4(P4) TP29.1(P1) U5.G5(SW4)
REF_VRST: R93.2(N2) U5.B6(REF_VRST)
RESETZ: TP24.1(P1) U5.B3(RESETZ) U12.J14(RESETZ)
RLIM: R92.1(N1) U5.F5(RLIM_K) U5.F6(RLIM_1) U5.F7(RLIM_2)
RTSZ: R90.2(N2) U5.F4(RSTZ)
S_STAT_LED: D2.1(P1) R129.1(N1)
S_STAT_LEDDRV: R129.2(N2) U8.4(Y)
SBPWR_FB: R94.2(N2) R95.1(N1) U7.1(FB/NC)
SBPWR_IN: C133.1(P) R128.1(N1) U7.4(IN)
SCL: P2.19(P19) R119.1(N1) U4.6(SCL) U12.A10(DBIC_SCL)
SDA: P2.20(P20) R118.1(N1) U4.5(SDA) U12.C10(DBIC_SDA)
SEL_A0: J5.2 R123.1(N1) U4.1(A0)
SEL_A1: J4.2 R122.1(N1) U4.2(A1)
SEL_A2: R121.1(N1) U4.3(A2)
SENS1: TP32.1(P1) U5.E4(SENS1)
SENS2: C37.1(P) R91.2(N2) U5.E5(SENS2)
SPICLK: R78.1(N1) R111.2(N2) U3.6(CLK) U5.C3(SPI_CLK)
SPICSZ0: R76.1(N1) R104.2(N2) U3.1(/CS)
SPICSZ1: R75.1(N1) R110.2(N2) U5.C4(SPI_CSZ)
SPIMISO: R112.2(N2) U3.2(DO) U5.C6(SPI_DOUT) U12.B4(SPIDIN)
SPIMOSI: R77.1(N1) U3.5(DI) U5.C5(SPI_DIN)
STAT_DRV: R126.2(N2) U6.4(Y)
STAT_LED: D3.2(P2) R126.1(N1)
SWN: D1.1(P1) L4.2 U5.A5(SWN)
SWP: L4.1 U5.A7(SWP)
SYSPWR: C1.2(N) C8.2(N) C9.2(N) C11.2(N) C12.2(N) C18.2(N) C19.2(N) C20.2(N) C21.2(N) C23.2(N) C28.1(P) C29.1(P) C30.1(P) C31.1(P) C32.1(P) C41.1(P) C43.1(P) C129.1(P) J2.1(PIN) J3.1 R96.2(N2) R97.2(N2) R117.1(N1) R124.1(N1) R125.2(N2) R128.2(N2) U1.1(VIN) U2.1(VIN) U5.A1(VINL_1) U5.A2(VINL_2) U5.A4(VINR)
SYSPWR_SHUNT: J2.3(SHUNT) R124.2(N2)
THERMISTOR_P: R89.1(N1) R91.1(N1) RT1.1 TP33.1(P1)
TSTPT_0: TP25.1(P1) U12.B6(TXD_TSTPT_0)
TSTPT_1: TP21.1(P1) U12.A8(GPO0_TSTPT_1)
TSTPT_2: TP19.1(P1) U12.C7(GPO1_TSTPT_2)
TSTPT_3: TP27.1(P1) U12.B5(GPO2_TSTPT_3)
TSTPT_4: TP22.1(P1) U12.A7(GPO3_TSTPT_4)
TSTPT_5: TP20.1(P1) U12.C8(GPO4_TSTPT_5)
TSTPT_6: TP6.1(P1) U12.N9(IRW_EN_TSTPT_6)
TSTPT_7: TP3.1(P1) U12.R9(IRW_SYNC_TSTPT_7)
VBIAS: C40.1(P) R68.1(N1) U5.B7(VBIAS)
VOFS: C39.1(P) R107.1(N1) U5.C7(VOFS)
VRST: C42.1(P) D1.2(P2) R69.1(N1) R93.1(N1)
VSYNC: P1.27(P27) U12.H14(VSYNC_WE)
X_OUT1: C122.1(P) R102.2(N2) XD100.1(P)
N16791220: R96.1(N1) U10.5(VCC)
N16866908: R120.1(N1) U4.7(WP)

Pads without a net: J1 39; P1 3 4 5 6 7 8 9 10 20 21 22 23 24 25; P2 4 5 6 7 8 9 10 11 12 13 14 16 17 18 21 22 23 24 25 26 27 28 29 30 31 32 33 34 35 36 37 38 39 40 41 42; U7 3; U8 1; U12 C2 C3 K14 N2 N3; U13 F3; XD100 2 4

## Via types
v1: diameter 0.457, hole 0.203, TOP to BOTTOM, 320 vias
v2: diameter 0.254, hole 0.102, TOP to LY2, 61 vias
v3: diameter 0.254, hole 0.102, LY2 to LY3, 48 vias
v4: diameter 0.254, hole 0.102, TOP to LY3, 221 vias
v5: diameter 0.483, hole 0.229, TOP to BOTTOM, 12 vias
v6: diameter 0.508, hole 0.254, TOP to BOTTOM, 17 vias
v7: diameter 0.406, hole 0.203, TOP to BOTTOM, 1 via

## Routing (per net, layer and track width the routed paths; a pad name or vN(x,y) marks a point on that pad's centre or on a via; arc(x,y) is an arc through that point)
DGND: length 297.8
  TOP w0.203: J1.33 v1(22.58,30.66) ; v2(67.4,21.66) 67.4,21.44 67.25,21.3 67.25,21.14 66.98,20.87 66.93,20.87 U5.A3 ; J1.5 v2(20.24,37.66) ; U5.C2 v2(66.05,21.58) ; J1.37 v1(22.58,29.66) ; U5.D6 U5.D7 65.65,18.79 v2(65.49,18.63)
  TOP w0.229: 22.58,36.04 v1(22.58,36.06) ; 22.58,36.04 22.58,35.59 22.16,35.16 J1.15 ; 22.58,36.04 22.6,36.07 22.6,36.39 22.33,36.66 J1.9 ; J1.38 16.04,29.66 v1(15.54,30.16) ; J1.45 v1(22.6,27.66) ; v1(15.54,30.16) 16.04,30.66 J1.34 ; v1(15.54,30.16) J1.36 ; J1.10 v1(15.76,36.66) ; J1.6 v1(15.77,37.66) ; J1.49 v1(22.6,26.66) ; J1.18 v1(15.75,34.66) ; v1(20.19,31.65) 20.19,32.03 20.83,32.66 J1.25 ; J1.28 v1(15.76,32.16)
  TOP w0.254: v1(26.42,35.59) 26.45,35.59 26.47,35.61 26.47,35.92 26.54,35.99 C13.2 C14.2 ; v1(16.83,26.14) J1.50 ; JLEDFLEX.6 v1(40.77,19.08)
  TOP w0.3: v1(51.59,43.23) 51.51,43.15 U13.B9 ; v1(57.91,35.6) U13.K1 ; U13.D9 v1(53.11,43.23) ; v6(44.71,36.08) 44.97,35.82 ; U13.A3 v6(49.99,37.79) ; v6(52.49,35.54) 52.31,35.71 U13.C1 ; U13.A1 v6(50.71,35.51) ; U13.E1 v6(53.91,35.51) ; U13.F1 v6(54.71,35.51)
  TOP w0.305: v1(41.58,35.23) 41.56,35.21 R58.1 ; v1(59.77,43.74) 59.75,43.73 C7.2 ; v6(48.83,42.21) 48.83,42.2 C10.2 ; C15.2 v1(50.56,34.29) ; v6(49.75,45.26) 49.75,45.26 50.06,44.95 C3.2 ; C4.2 v6(51.68,45.16) ; v6(43.54,35.51) 46.61,32.44 55.02,32.44 v6(55.85,33.27) ; v6(53.91,35.51) 53.92,35.5 53.92,34.9 53.81,34.78 C16.2 53.81,33.87 53.52,33.58 47.21,33.58 44.97,35.82
  TOP w0.381: v1(61.14,17.8) 61.5,18.16 C37.2 ; R1.2 v1(12.5,43.99) ; v1(12.5,43.99) U1.2 10.29,43.99 10.08,43.79 C1.1 ; v1(12.5,43.99) 12.5,46.28 13.07,46.85 C2.2 ; v5(20.89,7.92) 20.89,8.64 C43.2 19.75,8.64 v5(19.75,7.92) ; C42.2 v1(71.87,19.95) ; R94.1 43.24,11.93 v1(43.23,11.94) ; U4.4 28.89,17.91 v1(28.88,17.92) ; v1(15.77,37.66) 15.12,37.66 C126.2 ; R74.1 33.07,30.16 v1(33.07,29.2) ; v1(58.5,17.73) 58.93,18.16 RT1.2 ; v1(59,36.07) 59.09,36.15 C17.2 ; C6.2 v6(55.33,45.16) ; C26.2 v1(60.08,23.88) ; R72.2 v1(31.81,32.15) ; U10.2 v1(59.41,6.86) ; C23.1 28.12,24.8 28.32,25.01 U2.2 v1(30.53,25.01) R83.2 ; U6.3 43.11,10.56 v1(43.12,10.57) ; C34.2 v1(60.08,22.61) ; C24.2 33.8,27.86 33.67,27.73 32.97,27.73 v1(32.87,27.63) ; U3.4 49.29,25.78 v1(49.3,25.77) ; U6.1 43.03,9.26 v1(43.04,9.25) ; R23.1 v1(35.81,45.61) ; R92.2 v1(63.21,16.1) ; C27.1 v1(64.06,24.82) ; C25.2 v1(56.82,22.86) ; D3.1 v1(38.35,8.13) ; U11.2 v1(64.77,9.96) ; v1(21.72,41.71) 21.06,41.71 20.06,40.71 J1.51 ; C5.2 v6(53.31,45.16) ; U8.3 49.82,8.39 v1(49.81,8.38) ; v1(55.55,8.72) 55.56,8.71 U9.1 ; C36.1 61.86,20.07 61.41,20.52 61.41,20.5 v1(61.28,20.5) ; C40.2 66.92,14.98 v1(67.12,14.77) ; C39.2 v1(65.96,15.99) ; C44.2 v1(48.78,12.67) ; v1(17.5,25.12) 18.01,24.61 J1.52 ; U7.2 v1(44.41,9.7) ; C28.2 v1(72.25,27.37) ; C31.2 v1(72.25,23.56) ; C35.2 v1(60.08,21.34) 59.7,20.95 C33.2 ; C41.2 v1(69.96,21.78) ; C30.2 v1(72.25,24.83) ; U11.5 v1(64.77,12.59) ; v5(19.75,19.42) 19.75,18.71 C32.2 20.89,18.71 v5(20.89,19.42) ; C38.2 v1(65.01,15.98) ; C29.2 v1(72.25,26.1)
  LY2 w0.102: v2(32.71,37.53) 32.71,37.79 32.72,37.8 ; v2(33.91,37.53) 33.77,37.53 33.27,38.02 ; v2(33.91,40.73) v2(33.91,39.93)
  LY2 w0.381: P1.2 10.38,51.9 ; P1.2 10.38,53.51 ; P1.2 8.77,53.51 ; P1.2 8.77,51.9 ; P1.1 10.38,49.36 ; P1.1 8.77,49.36 ; P1.1 8.77,50.97 ; P1.1 10.38,50.97 ; J2.2 7.9,15.72 ; J2.2 7.9,11.3 ; J2.2 5.51,15.72 ; J2.2 5.51,11.3 ; TPGND1.1 16.82,7.79 ; TPGND1.1 16.82,6.54 ; TPGND1.1 15.57,6.54 ; TPGND1.1 15.57,7.79 ; 8.77,3.64 P2.2 ; P2.2 10.38,5.25 ; P2.2 10.38,3.64 ; P2.2 8.77,5.25 ; P2.46 66.26,5.25 ; P2.46 64.65,5.25 ; P2.46 66.26,3.64 ; P2.46 64.65,3.64 ; P2.44 63.72,3.64 ; P2.44 62.11,3.64 ; P2.44 63.72,5.25 ; P2.44 62.11,5.25 ; 22.92,10.4 J4.1 ; J4.1 22.92,12.19 ; J4.1 24.71,10.4 ; J4.1 24.71,12.19 ; 70.49,12.87 TPGND2.1 ; TPGND2.1 71.75,12.87 ; TPGND2.1 71.75,11.62 ; TPGND2.1 70.49,11.62 ; 64.65,2.71 P2.45 ; P2.45 64.65,1.1 ; P2.45 66.26,2.71 ; P2.1 10.38,2.71 ; P2.1 10.38,1.1 ; P2.1 8.77,2.71 ; P2.1 8.77,1.1 ; 25.78,10.4 J5.1 ; J5.1 27.56,10.4 ; J5.1 27.56,12.19 ; J5.1 25.78,12.19 ; 15.62,11.87 J3.2 ; J3.2 17.4,11.87 ; J3.2 17.4,10.08 ; J3.2 15.62,10.08
  LY3 w0.152: v4(30.71,37.53) 30.8,37.62 30.8,37.65 30.98,37.83 31.25,37.83 31.51,37.57 v4(31.51,37.53) ; v1(32.36,39.12) 32.15,38.91 31.27,38.91 31.09,38.73 v4(30.71,38.73)
  LY5 w0.381: P2.2 10.38,3.64 ; P2.2 10.38,5.25 ; P2.2 8.77,5.25 ; P2.2 8.77,3.64 ; J2.2 7.9,11.3 ; J2.2 7.9,15.72 ; J2.2 5.51,15.72 ; J2.2 5.51,11.3 ; 64.65,1.1 P2.45 ; P2.45 64.65,2.71 ; P2.45 66.26,2.71 ; TPGND2.1 71.75,11.62 ; TPGND2.1 70.49,11.62 ; TPGND2.1 70.49,12.87 ; TPGND2.1 71.75,12.87 ; 64.65,3.64 P2.46 ; P2.46 64.65,5.25 ; P2.46 66.26,3.64 ; P2.46 66.26,5.25 ; TPGND1.1 16.82,6.54 ; TPGND1.1 16.82,7.79 ; TPGND1.1 15.57,6.54 ; TPGND1.1 15.57,7.79 ; J5.1 27.56,12.19 ; J5.1 27.56,10.4 ; J5.1 25.78,12.19 ; J5.1 25.78,10.4 ; 22.92,12.19 J4.1 ; J4.1 22.92,10.4 ; J4.1 24.71,12.19 ; J4.1 24.71,10.4 ; 15.62,11.87 J3.2 ; J3.2 17.4,10.08 ; J3.2 15.62,10.08 ; J3.2 17.4,11.87 ; P1.1 10.38,50.97 ; P1.1 8.77,50.97 ; P1.1 10.38,49.36 ; P1.1 8.77,49.36 ; 8.77,51.9 P1.2 ; P1.2 8.77,53.51 ; P1.2 10.38,51.9 ; P1.2 10.38,53.51 ; P2.1 10.38,1.1 ; P2.1 8.77,2.71 ; P2.1 10.38,2.71 ; P2.1 8.77,1.1 ; P2.44 63.72,5.25 ; P2.44 63.72,3.64 ; P2.44 62.11,3.64 ; P2.44 62.11,5.25
  BOTTOM w0.254: v1(29.76,34.73) 30.24,35.22 C119.2 ; C106.2 C108.2 C110.2 28.39,39.96 27.56,40.79 24.08,40.79 23.16,41.71 v1(21.72,41.71) 20.45,41.71 19.61,40.87 19.61,36.83 20.37,36.07 22.56,36.07 22.57,36.06 v1(22.58,36.06) 22.6,36.06 22.61,36.07 24.33,36.07 26.49,38.23 v1(26.55,38.23)
  BOTTOM w0.305: R100.2 v1(56.64,40.39)
  BOTTOM w0.381: C122.2 20.46,39.2 v7(20.07,39.6) 19.61,39.6 19.61,39.6 ; v1(50.49,11.08) 50.71,10.86 C132.2 ; C111.1 24.66,37.99 v1(24.72,37.93) ; C127.2 v1(20.19,31.65) ; C133.2 46.53,9.37 v1(46.86,9.7) ; C124.2 v1(18.16,31.17) ; v1(69.96,21.78) C41.2 ; F100.2 v1(26.55,38.23) ; v1(41.54,8.52) 41.08,8.97 C134.2 ; R111.1 v1(53.02,27.05) ; v1(69.44,18.75) 69.44,19.01 C130.2 ; C125.2 v1(18.16,29.16) ; C123.2 v1(53.02,29.59) ; R112.1 v1(49.25,28.32) ; C131.2 v1(24.33,20.93)
  BOTTOM w0.508: C128.2 v1(17.5,26.06)
  vias: v1(9.21,46.85) v1(25.91,44.32) v1(26.64,44.33) v1(34.36,44.65) v1(34.34,43.84) v1(35.81,43.94) v1(35.85,44.75) v1(60.01,46.53) v1(62.89,45.33) v1(62.89,44.06) v1(62.89,42.79) v1(62.89,41.52) v1(62.89,40.25) v1(62.89,38.98) v1(62.89,37.71) v1(62.89,36.44) v1(62.89,35.17) v1(62.89,33.9) v1(62.89,32.63) v1(64.96,30.02) v1(69.48,44.95) v1(69.51,44.06) v1(69.51,42.79) v1(69.51,41.52) v1(69.51,40.25) v1(69.51,38.98) v1(69.51,37.71) v1(69.51,36.44) v1(69.51,35.17) v1(69.51,33.9) v1(69.51,32.63) v2(30.71,40.33) v2(31.51,40.73) v2(32.71,40.73) v2(33.91,39.13) v2(33.91,38.73) v2(66.85,19.58) v3(64.58,22.9) v3(65.02,23.31) v3(65.65,22.31) v3(66.45,22.32)
V2V5: length 1.6
  TOP w0.203: C38.1 65.01,18.76 65.25,19 U5.E7
V6V: length 1.8
  TOP w0.203: U5.F1 64.85,21.87 64.06,22.66 C27.2
VDD_PLL: length 5.4
  LY2 w0.102: v1(31.44,38.5) 31.27,38.5 31.17,38.6 31.17,38.98 31.02,39.13 v2(30.71,39.13)
  BOTTOM w0.132: F101.2 29.31,36.7 C121.2 29.87,36.68 C120.1 30.59,37.17 31.06,37.64 31.06,38.13 v1(31.44,38.5)
VINA: length 2.2
  TOP w0.203: C36.2 v1(63.61,20.07) 63.91,20.07 64.22,20.38 U5.G4
  BOTTOM w0.132: C36.2 v1(63.61,20.07)
VINTF: length 24.3
  TOP w0.102: U12.E12 v4(31.11,37.53) 31.11,37.53 31.39,37.81 31.7,37.81 32.16,38.27 v1(32.16,38.43)
  TOP w0.381: U11.1 61.62,9.04 TP34.1 ; v1(25.1,22.87) 25.08,22.86 U4.8
  LY4 w0.381: P2.3 12.92,1.1 ; P2.3 12.92,2.71 ; P2.3 11.31,1.1 ; P2.3 11.31,2.71 ; TP34.1 62.15,8.51 ; TP34.1 61.04,8.51 ; TP34.1 61.04,9.62 ; TP34.1 62.15,9.62
  BOTTOM w0.254: C118.1 C119.1 ; C118.1 31.51,35.76 31.43,35.67 v1(31.43,35.1) ; C118.1 31.51,37.77 v1(32.16,38.43)
  BOTTOM w0.381: C131.1 25.1,21.98 v1(25.1,22.87) ; R120.2 v1(26.35,22.85) ; R118.2 v1(28.89,22.85) ; v1(27.63,17.87) 27.62,17.86 R121.2 ; R119.2 v1(27.62,22.85) ; R123.2 v1(25.08,17.87) ; R122.2 v1(26.35,17.87)
VSS_PLL: length 5.7
  LY3 w0.102: v4(30.31,39.53) 30.31,39.53 30.59,39.25 31.47,39.25 v1(31.55,39.33)
  BOTTOM w0.132: v1(31.55,39.33) 30.77,38.55 30.77,38.18 30.35,37.77 C120.2 29.87,38.25 C121.1 28.36,38.25 F100.1
B[0]: length 42.2
  LY2 w0.102: v3(29.06,38.56) 29.22,38.73 v2(29.91,38.73)
  LY3 w0.132: v1(25.81,35.16) 25.81,35.16 25.81,35.57 26.71,36.46 26.71,36.69 28.58,38.56 v3(29.06,38.56)
  BOTTOM w0.132: P1.19 29.76,47.49 18.37,47.49 16,45.12 16,40.59 17.39,39.2 17.39,37.32 19.05,35.66 23.75,35.66 24.25,35.16 v1(25.81,35.16)
B[1]: length 41.6
  LY3 w0.102: 28.73,38.28 29.17,38.28 29.62,38.73 v4(30.31,38.73)
  LY3 w0.132: 28.73,38.28 28.65,38.28 26.95,36.58 26.95,35.27 v1(26.39,34.71)
  BOTTOM w0.132: v1(26.39,34.71) 24.25,34.71 24.13,34.83 24.11,34.83 23.61,35.33 18.91,35.33 17.05,37.19 17.05,37.46 17.05,38.93 15.65,40.34 15.65,45.24 18.23,47.82 27.55,47.82 P1.17
B[2]: length 45.9
  TOP w0.132: U12.F15 27.52,38.33 27.03,37.83 25.95,37.83 25.04,36.92 25.04,33.55 24.91,33.42 24.91,33.41 v1(24.46,32.95)
  BOTTOM w0.132: P1.16 25.9,51.25 24.11,51.25 23.62,50.75 23.62,49.68 22.43,48.49 17.84,48.49 14.91,45.57 14.91,36.6 15.28,36.23 17.06,36.23 18.65,34.65 23.29,34.65 23.54,34.4 23.54,33.36 23.69,33.21 23.95,32.95 v1(24.46,32.95)
B[3]: length 43.1
  LY2 w0.102: v2(29.91,38.33) 29.21,38.33 28.85,37.97 v3(28.76,37.97)
  LY3 w0.132: v3(28.76,37.97) 27.22,36.43 v1(27.22,34.37)
  BOTTOM w0.132: v1(27.22,34.37) 28.73,34.37 29.48,33.63 34.22,33.63 40.28,39.69 40.28,46.39 43.74,49.85 43.74,52.66 44.74,53.66 49.26,53.66 P1.34
B[4]: length 45.9
  LY3 w0.102: 29.22,38 29.02,37.81
  LY3 w0.132: v1(26.82,32) 26.8,32 26.44,32.36 26.44,33.15 26.7,33.41 26.81,33.41 27.61,34.21 27.61,34.54 27.55,34.6 27.55,36.34 29.02,37.81 29.02,37.83 29.2,38 29.22,38 29.54,38.33 v4(30.31,38.33)
  BOTTOM w0.132: v1(26.82,32) 26.82,32.03 26.85,32 27.31,32 28.15,31.16 28.37,31.16 29.14,30.38 34.77,30.38 35.39,31 36.21,31 44.45,39.24 44.45,42.91 50.23,48.69 51.14,48.69 52.61,50.16 P1.35
B[5]: length 44.7
  TOP w0.132: U12.E15 27.64,37.93 27.2,37.5 26.09,37.5 25.37,36.78 25.37,33.41 25.25,33.28 25.25,32.43 25.55,32.13 25.74,32.13 25.74,32.14 v1(25.73,32.14)
  BOTTOM w0.132: v1(25.73,32.14) 25.74,32.14 25.74,32.13 25.75,32.15 25.76,32.15 25.76,32.13 26.02,32.4 27.38,32.4 28.29,31.5 29.3,31.5 29.75,31.05 34.49,31.05 43.74,40.3 43.74,43.69 P1.33
B[6]: length 38.8
  LY2 w0.102: v2(29.91,37.93) 29.54,37.93 v3(29.32,37.71)
  LY3 w0.132: v3(29.32,37.71) 27.8,36.19 27.8,34.7 27.86,34.64 27.86,34.01 v1(26.86,33.01)
  BOTTOM w0.132: P1.31 42.27,44.75 42.27,39.78 34.21,31.72 30.02,31.72 29.58,32.17 28.57,32.17 28.27,32.46 28.27,32.82 27.82,33.27 27.49,33.27 27.3,33.08 26.92,33.08 v1(26.86,33.01)
B[7]: length 37.6
  LY3 w0.102: 28.54,35.59 29.74,36.79 29.74,37.36 v4(30.31,37.93)
  LY3 w0.132: v1(28.73,32.57) 28.6,32.7 28.6,34.95 28.54,35.01 28.54,35.59
  BOTTOM w0.132: P1.32 46.33,51.36 46.33,50.01 41.66,45.33 41.66,39.64 34.58,32.57 v1(28.73,32.57)
BLU_CATHODE: length 12.6
  LY3 w0.254: v4(64.45,19.18) 64.42,19.18 63.84,18.6 62.74,18.6
  LY3 w0.508: 62.74,18.6 62.29,18.15 62.29,17.97 60.83,16.51 TP31.1
CMP_OUT: length 48
  TOP w0.132: U12.A6 33.11,35.27 33.87,34.51 33.87,33.7 33.77,33.61 33.77,32.01 R74.2 33.03,31.25 33.53,30.75 33.53,28.88 v4(33.73,28.69)
  LY3 w0.132: v4(33.73,28.69) 33.99,28.43 33.99,22.59 35.47,21.11 53.67,21.11 54.2,20.57 55.74,20.57 56.06,20.89 60.42,20.89 60.68,21.16 62.36,21.16 62.46,21.06 64.08,21.06 64.25,20.89 65.35,20.89 65.65,20.6 v4(65.65,20.38)
CMP_PWM_F: length 1.9
  TOP w0.132: R85.2 C25.1 R86.1
CMP_PWM_F2: length 1.9
  TOP w0.132: R86.2 C33.1 R87.1
CMP_PWR: length 58.9
  TOP w0.132: R89.2 v1(57.94,17.21)
  LY2 w0.102: v2(33.51,41.53) 33.51,41.84 33.85,42.18 33.92,42.18 33.92,42.2 v3(33.9,42.2)
  LY3 w0.102: v3(33.9,42.2) 34.31,42.61 34.31,42.67
  LY3 w0.132: 34.31,42.67 35.11,43.47 36.04,43.47 37.02,44.44 37.02,45.06 38.55,46.6 57.82,46.6 v1(59.12,45.3)
  BOTTOM w0.132: v1(57.94,17.21) 57.94,18.68 58.26,19 58.26,35.32 58.32,35.38 58.32,36.84 59.12,37.65 v1(59.12,45.3)
